# Altium PCB Copy of DAP-PCB.PcbDoc (part 1 of 5)
Units mm, origin at the board's own origin, x right, y up, seen from the top; angles counter-clockwise.
Board outline 63 x 53 mm, 6 copper layers (Top Layer (Sig), L2 (GND), L3 (Sig), L4 (Sig), L5 (GND), Bottom Layer (Sig)), stack 0.87 mm thick; 262 components, 167 nets, 874 pads, 298 vias.
Unrouted connection lines stored in the file: 134.
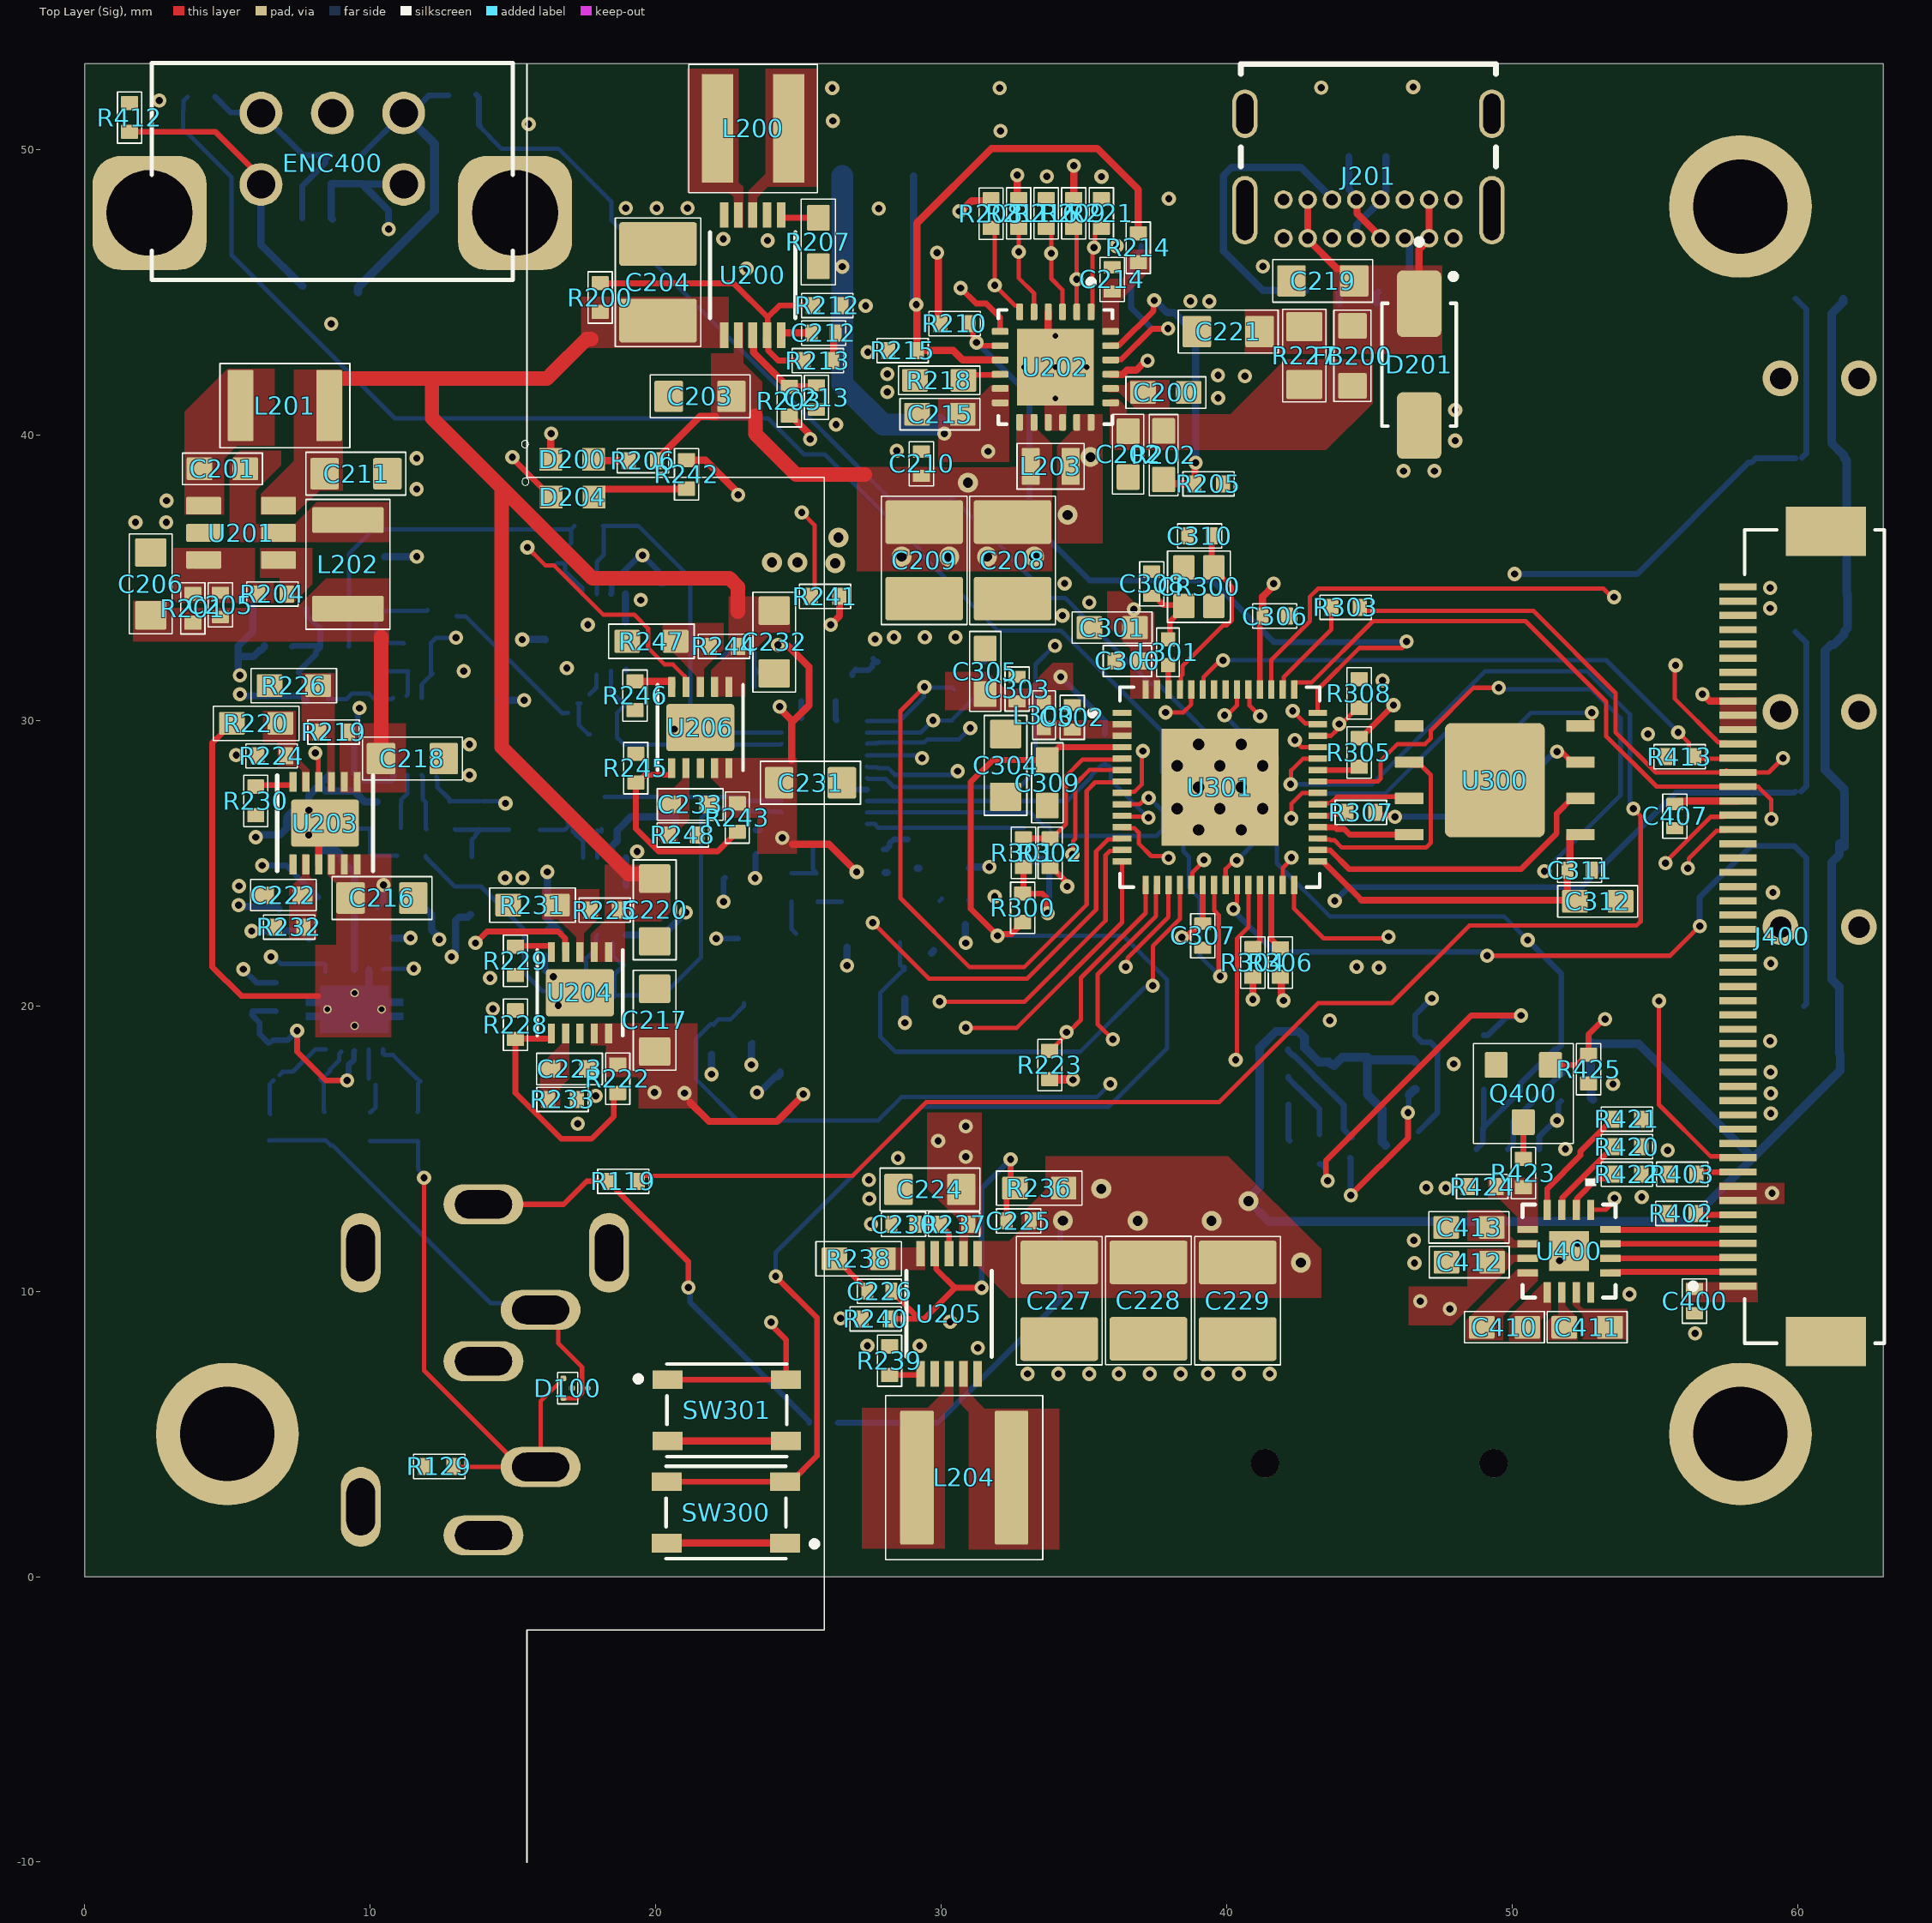
[diagram p0: Top Layer (Sig) view]
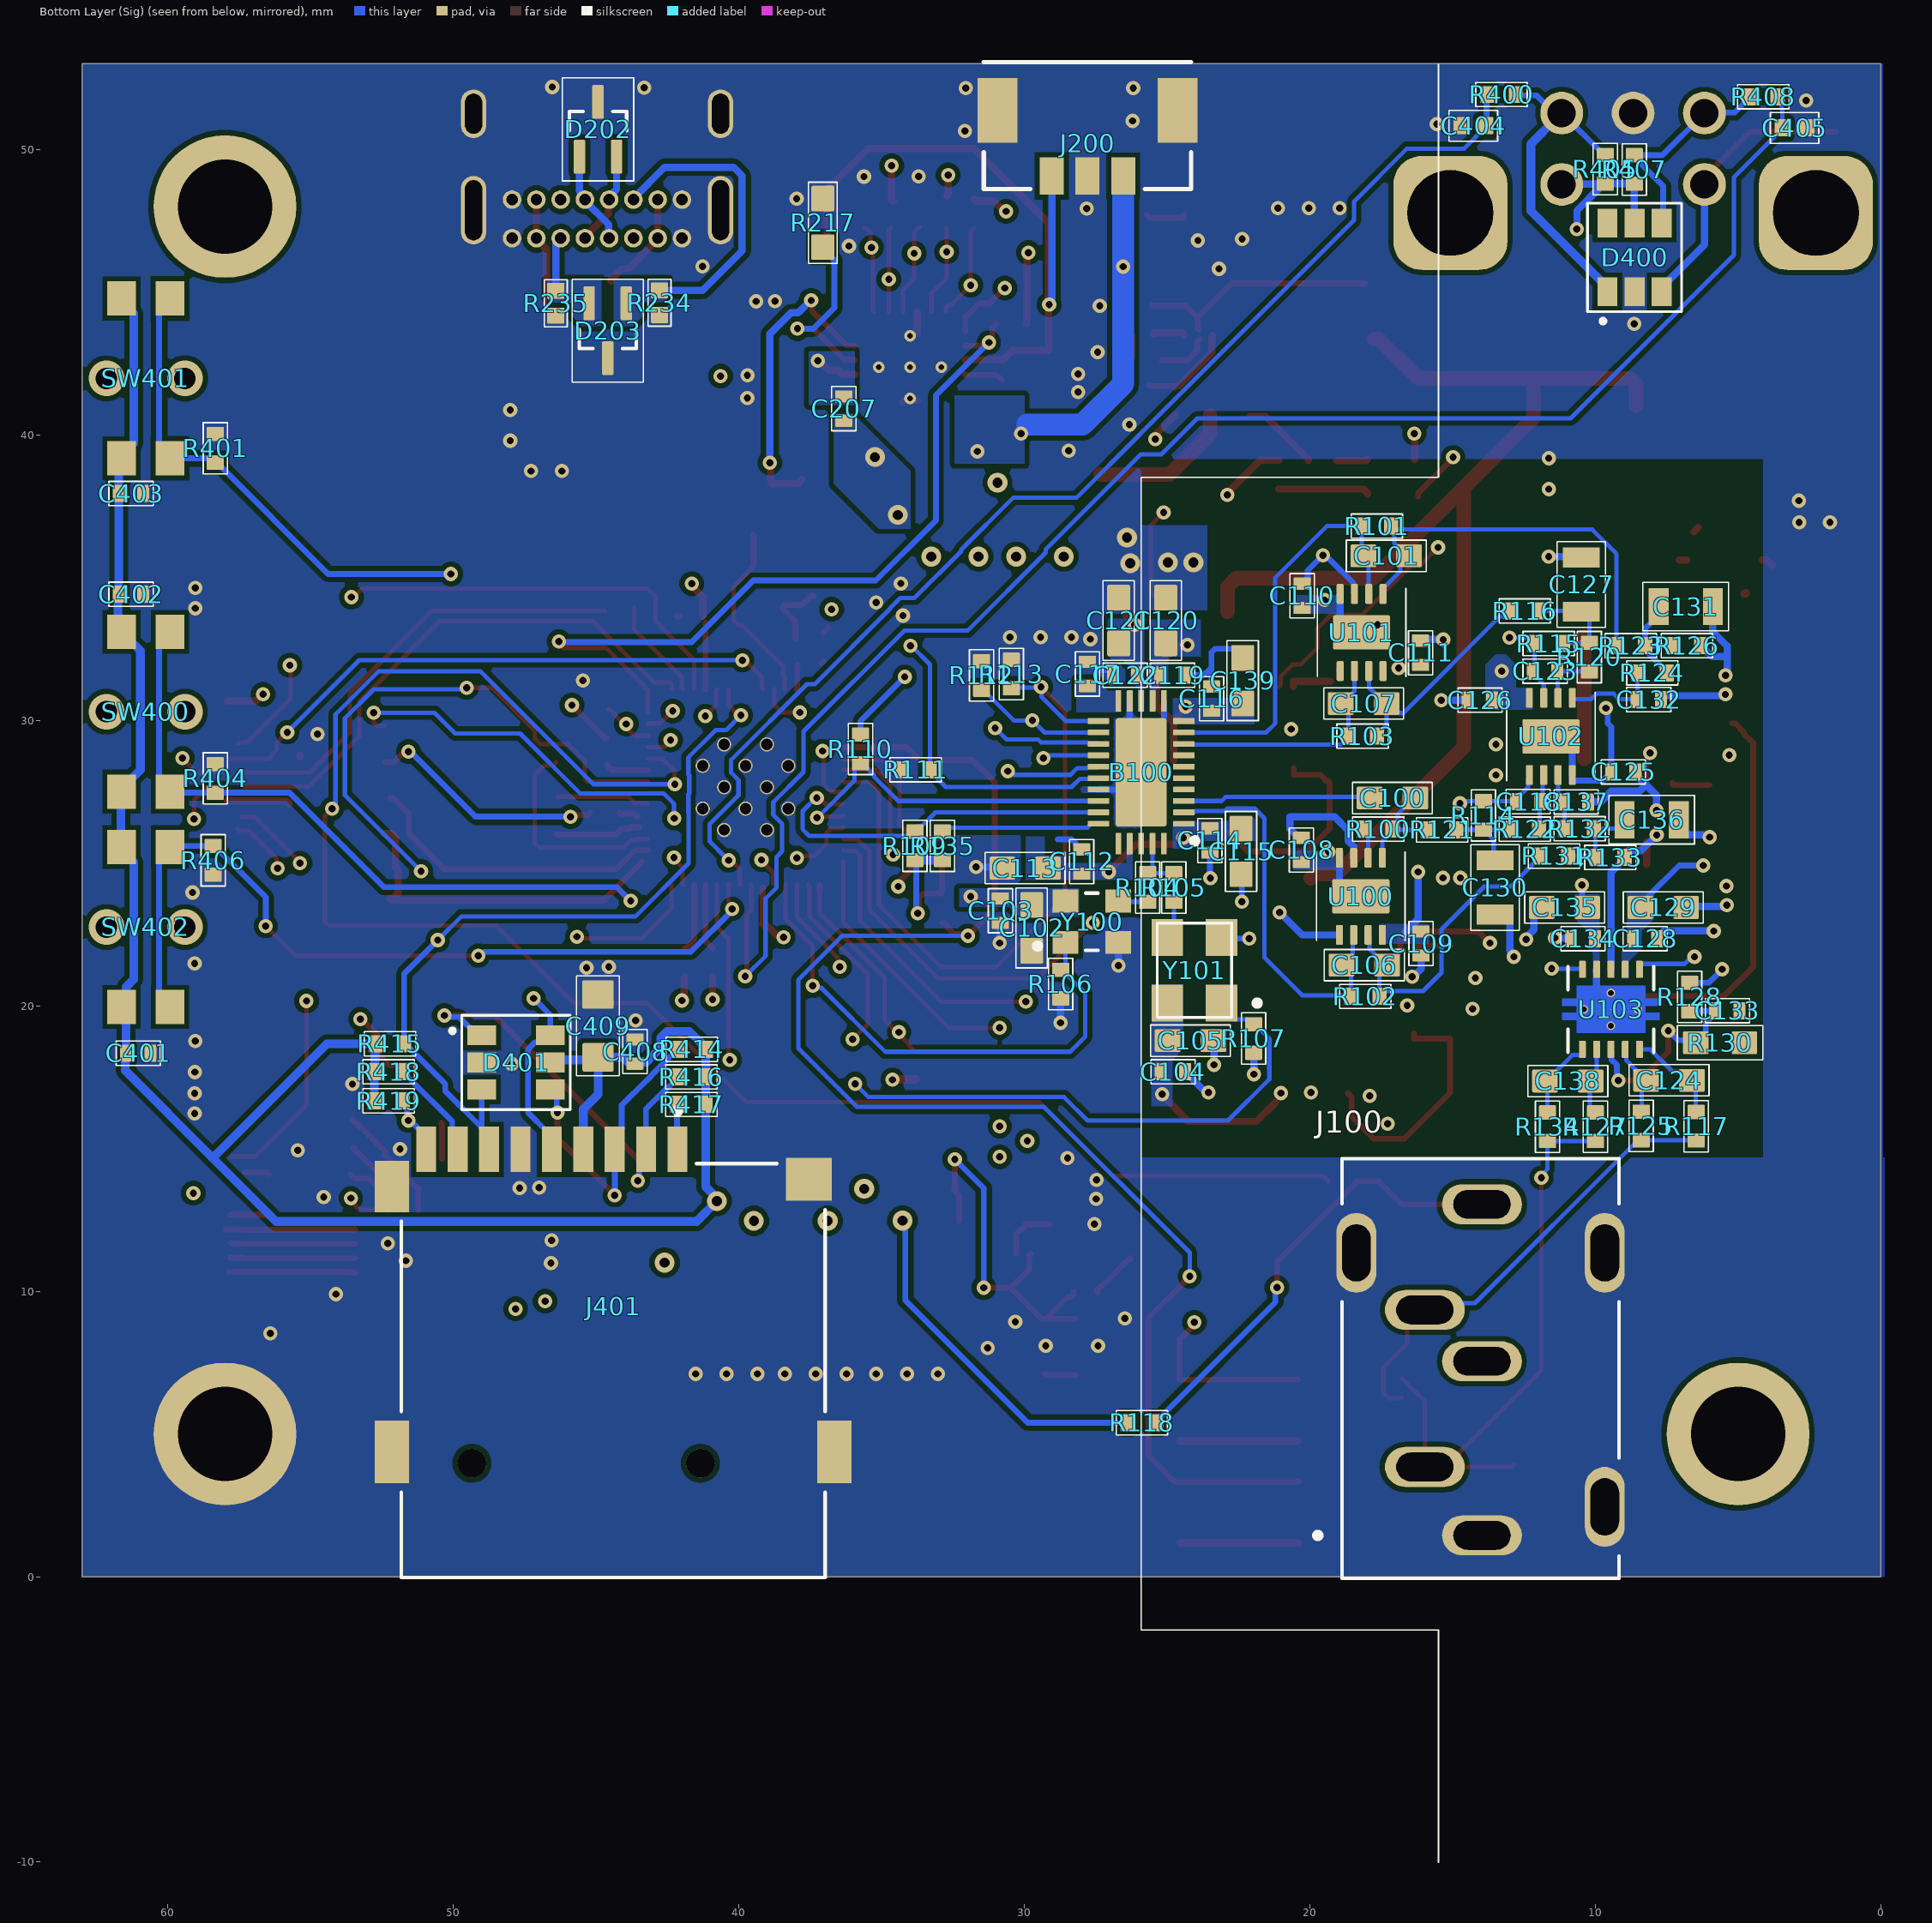
[diagram p1: Bottom Layer (Sig) view, seen from below]
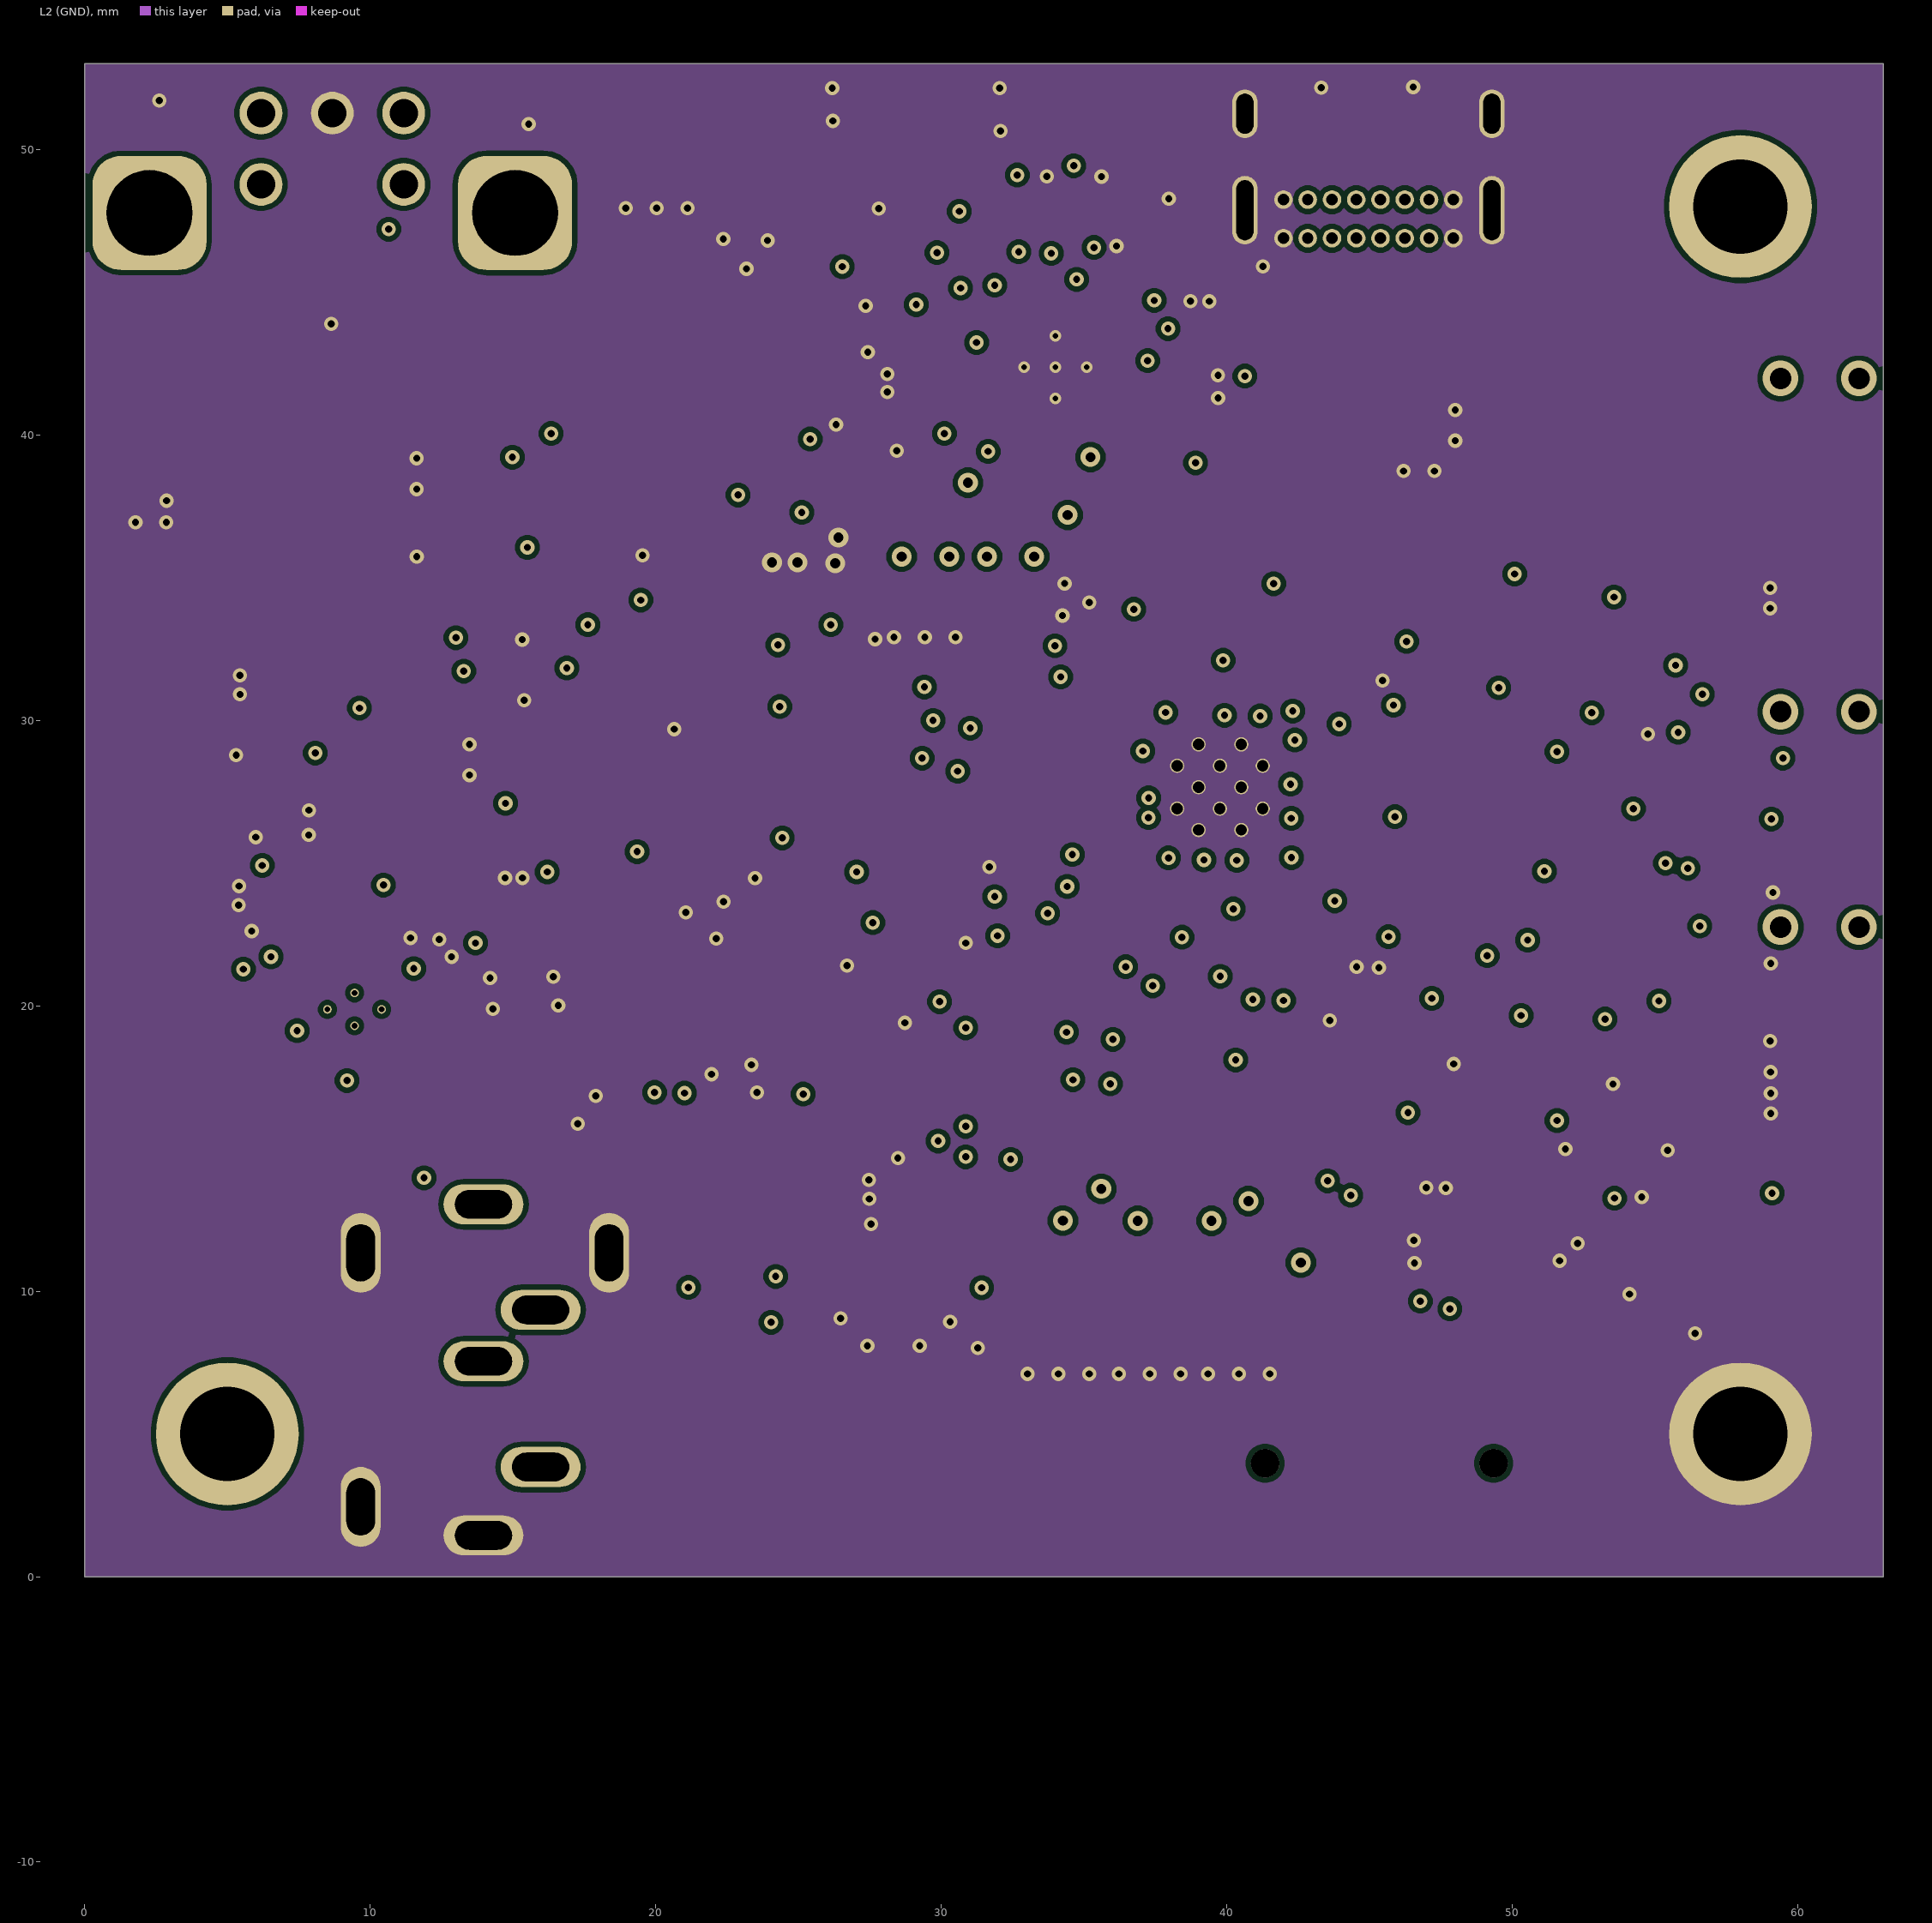
[diagram p2: L2 (GND)]
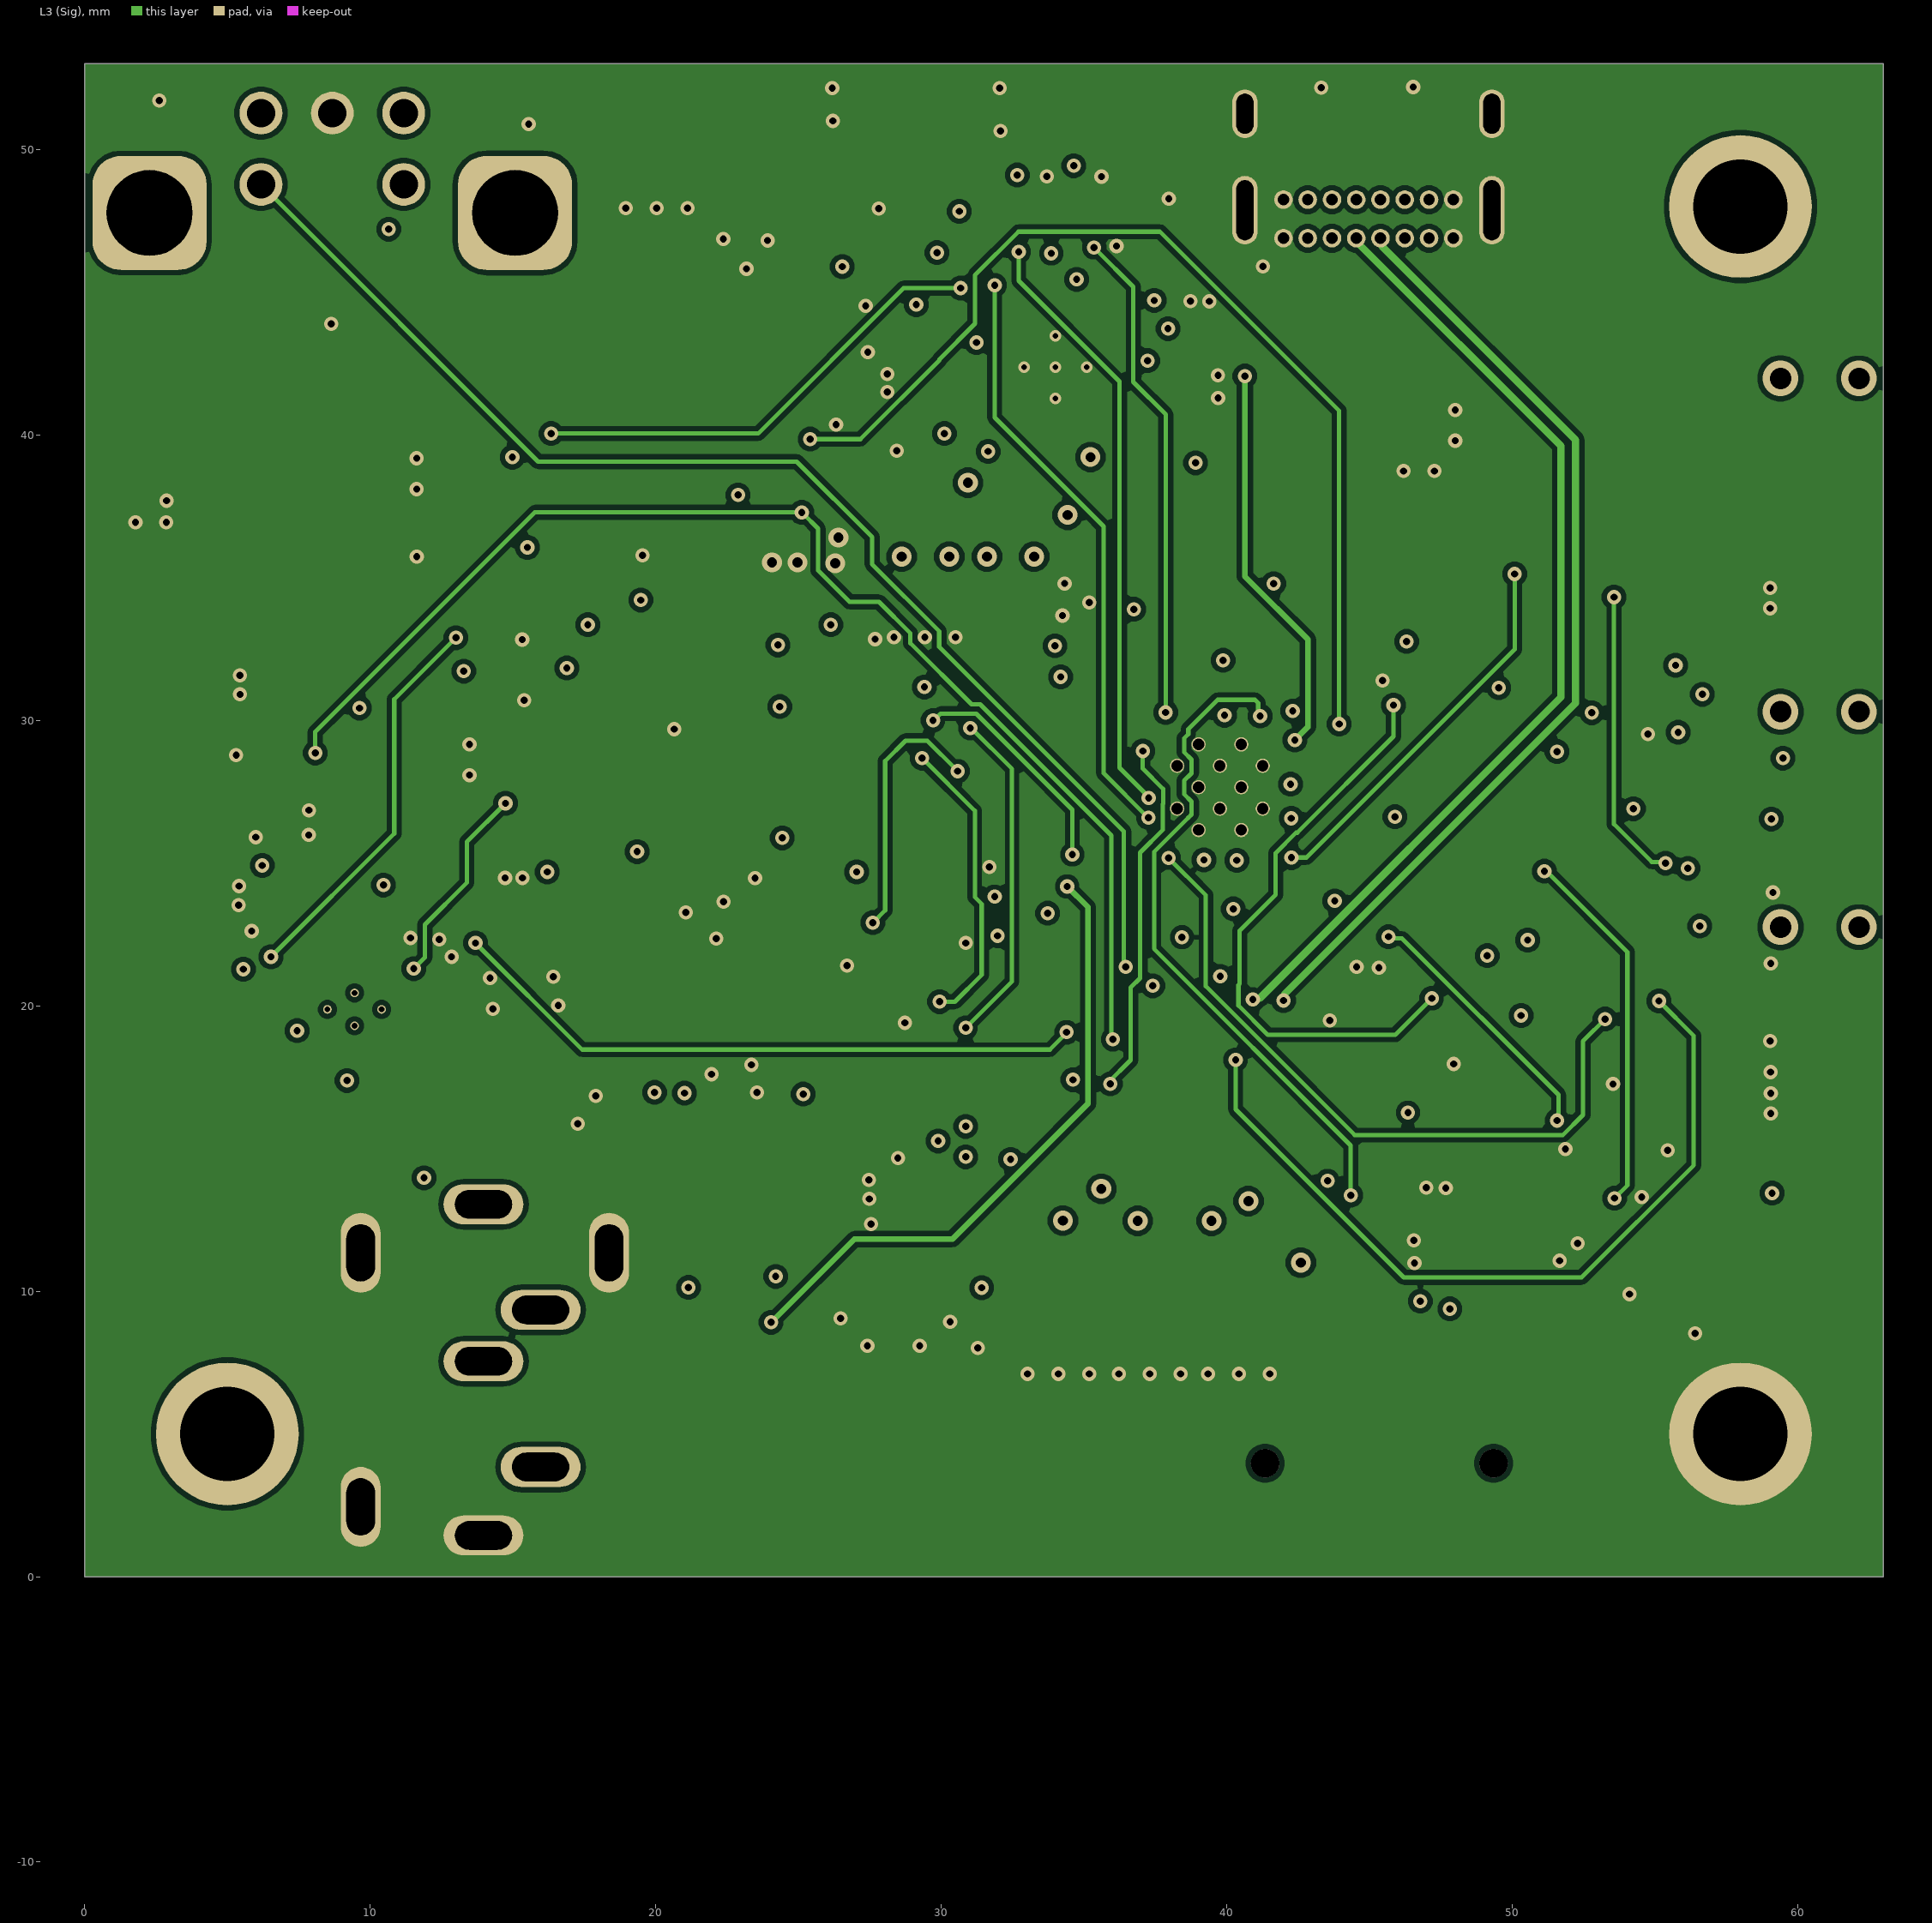
[diagram p3: L3 (Sig)]
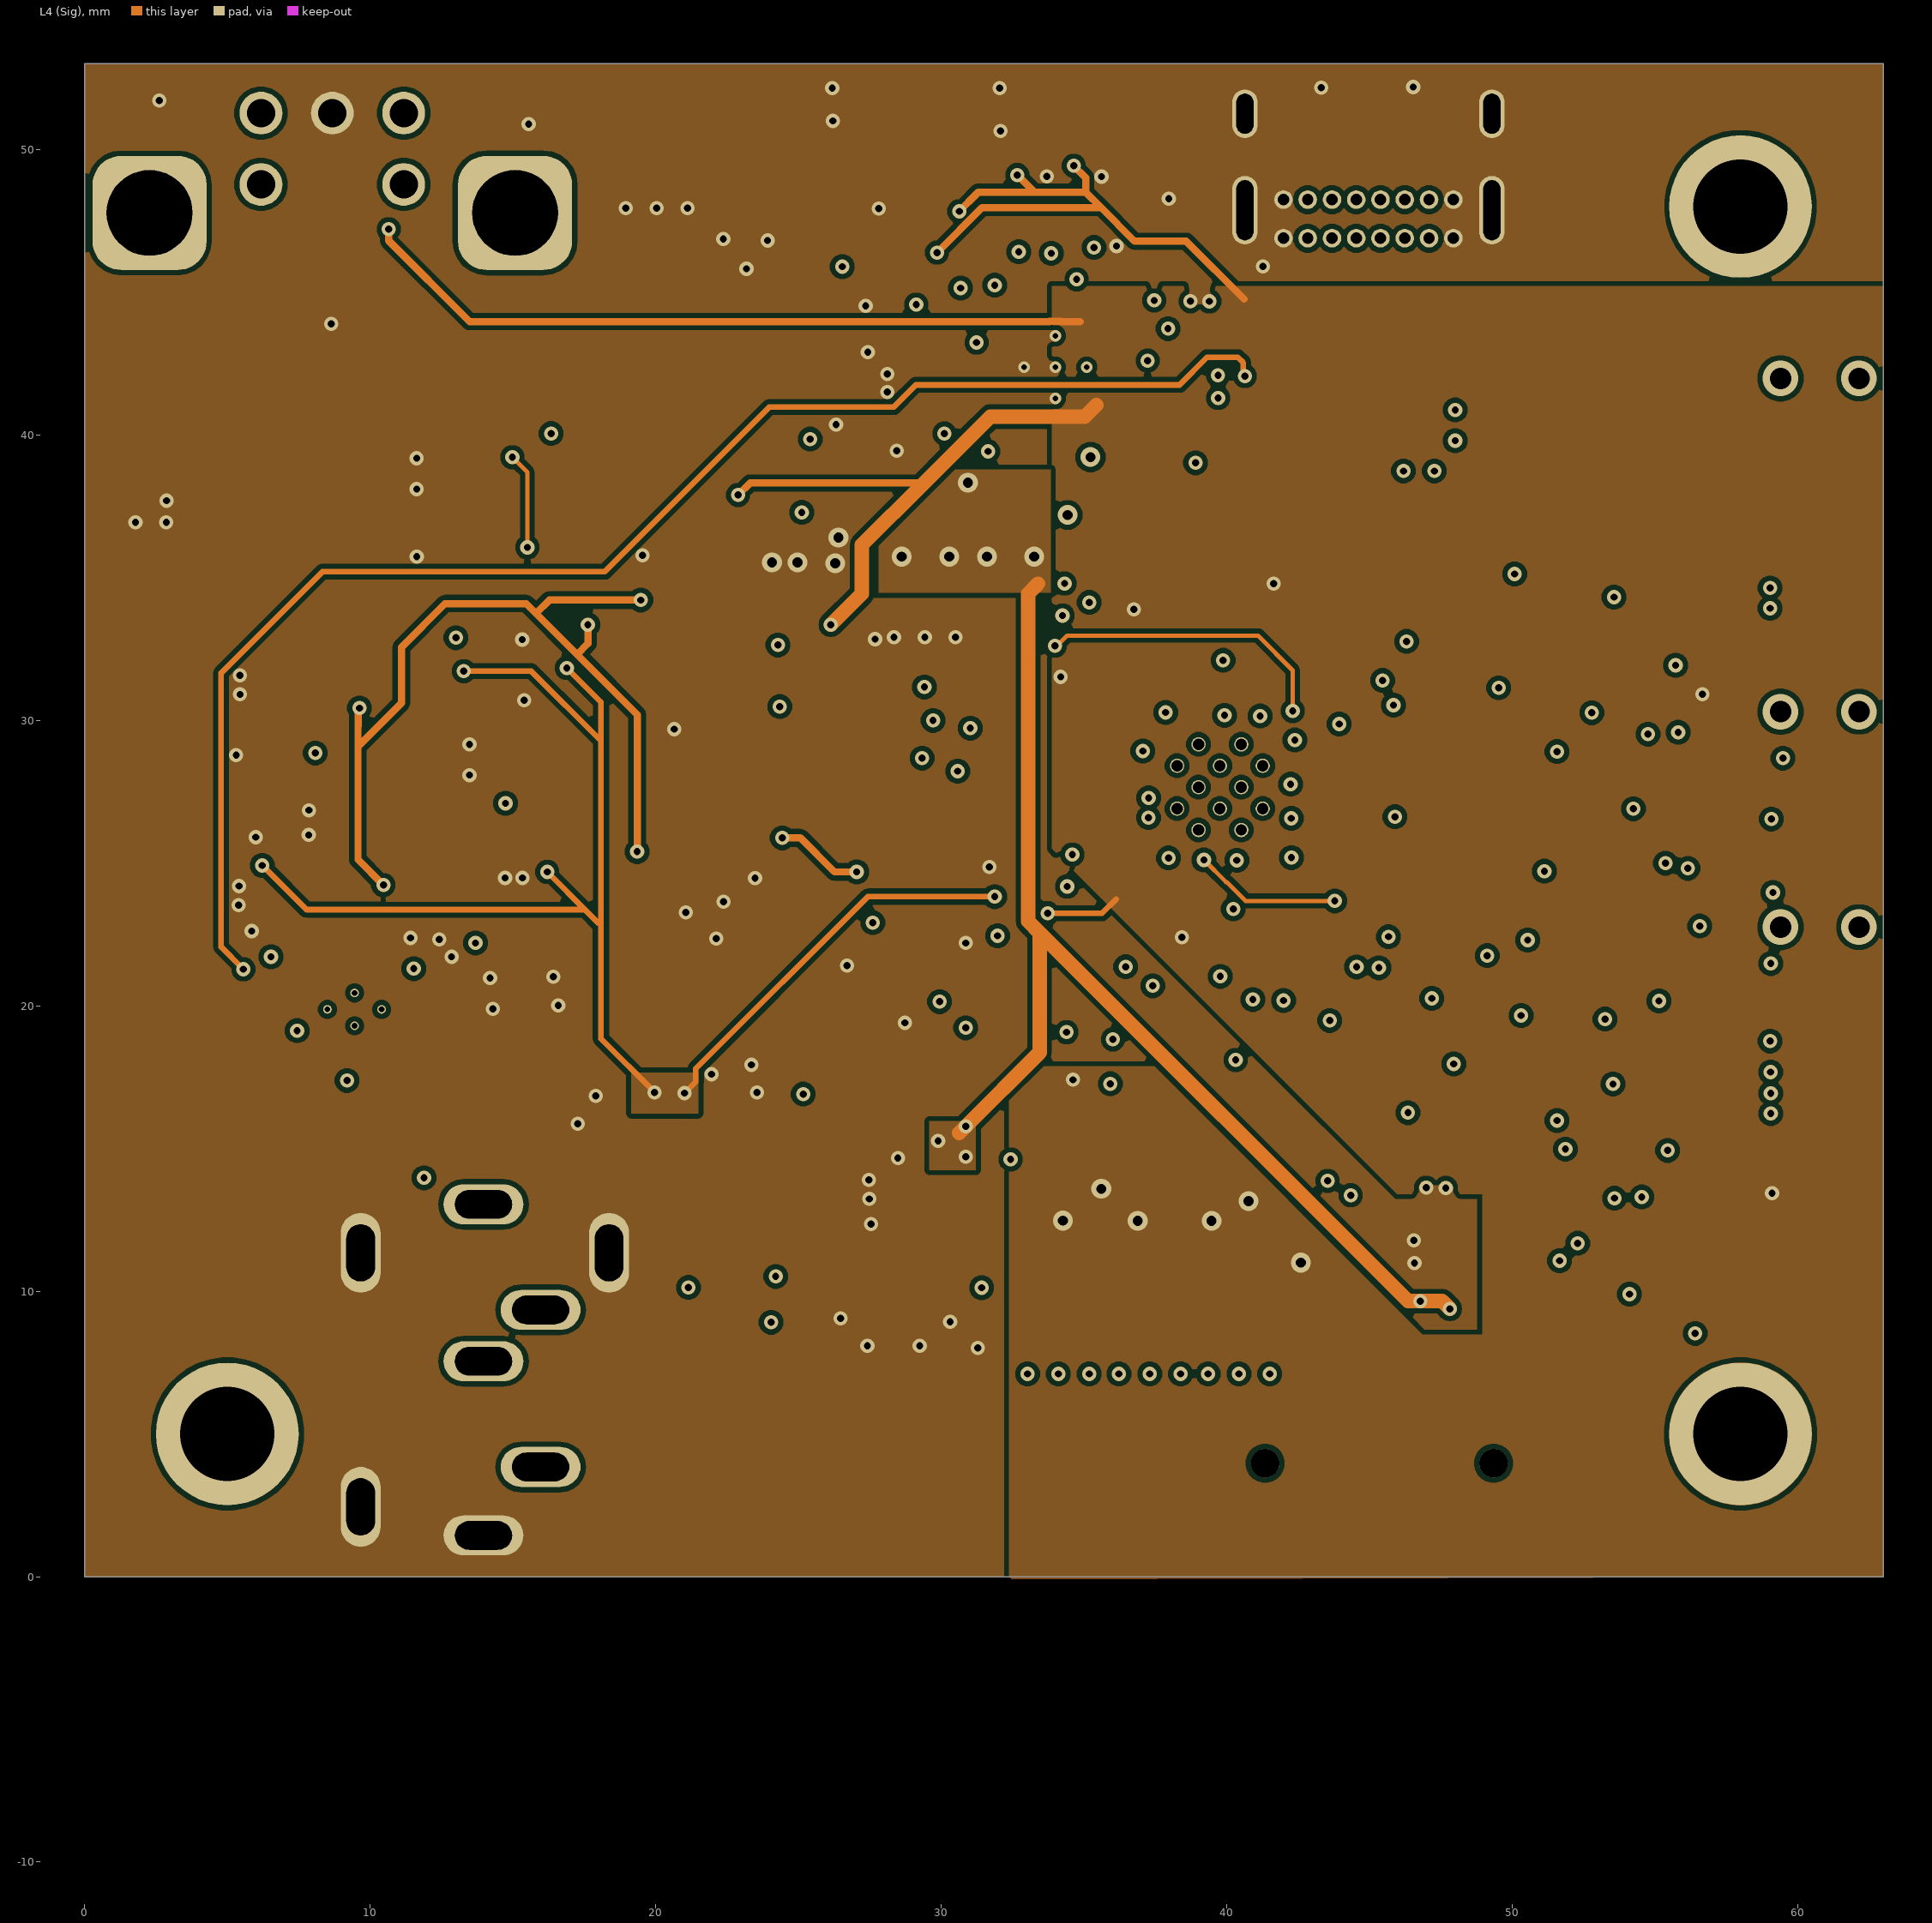
[diagram p4: L4 (Sig)]
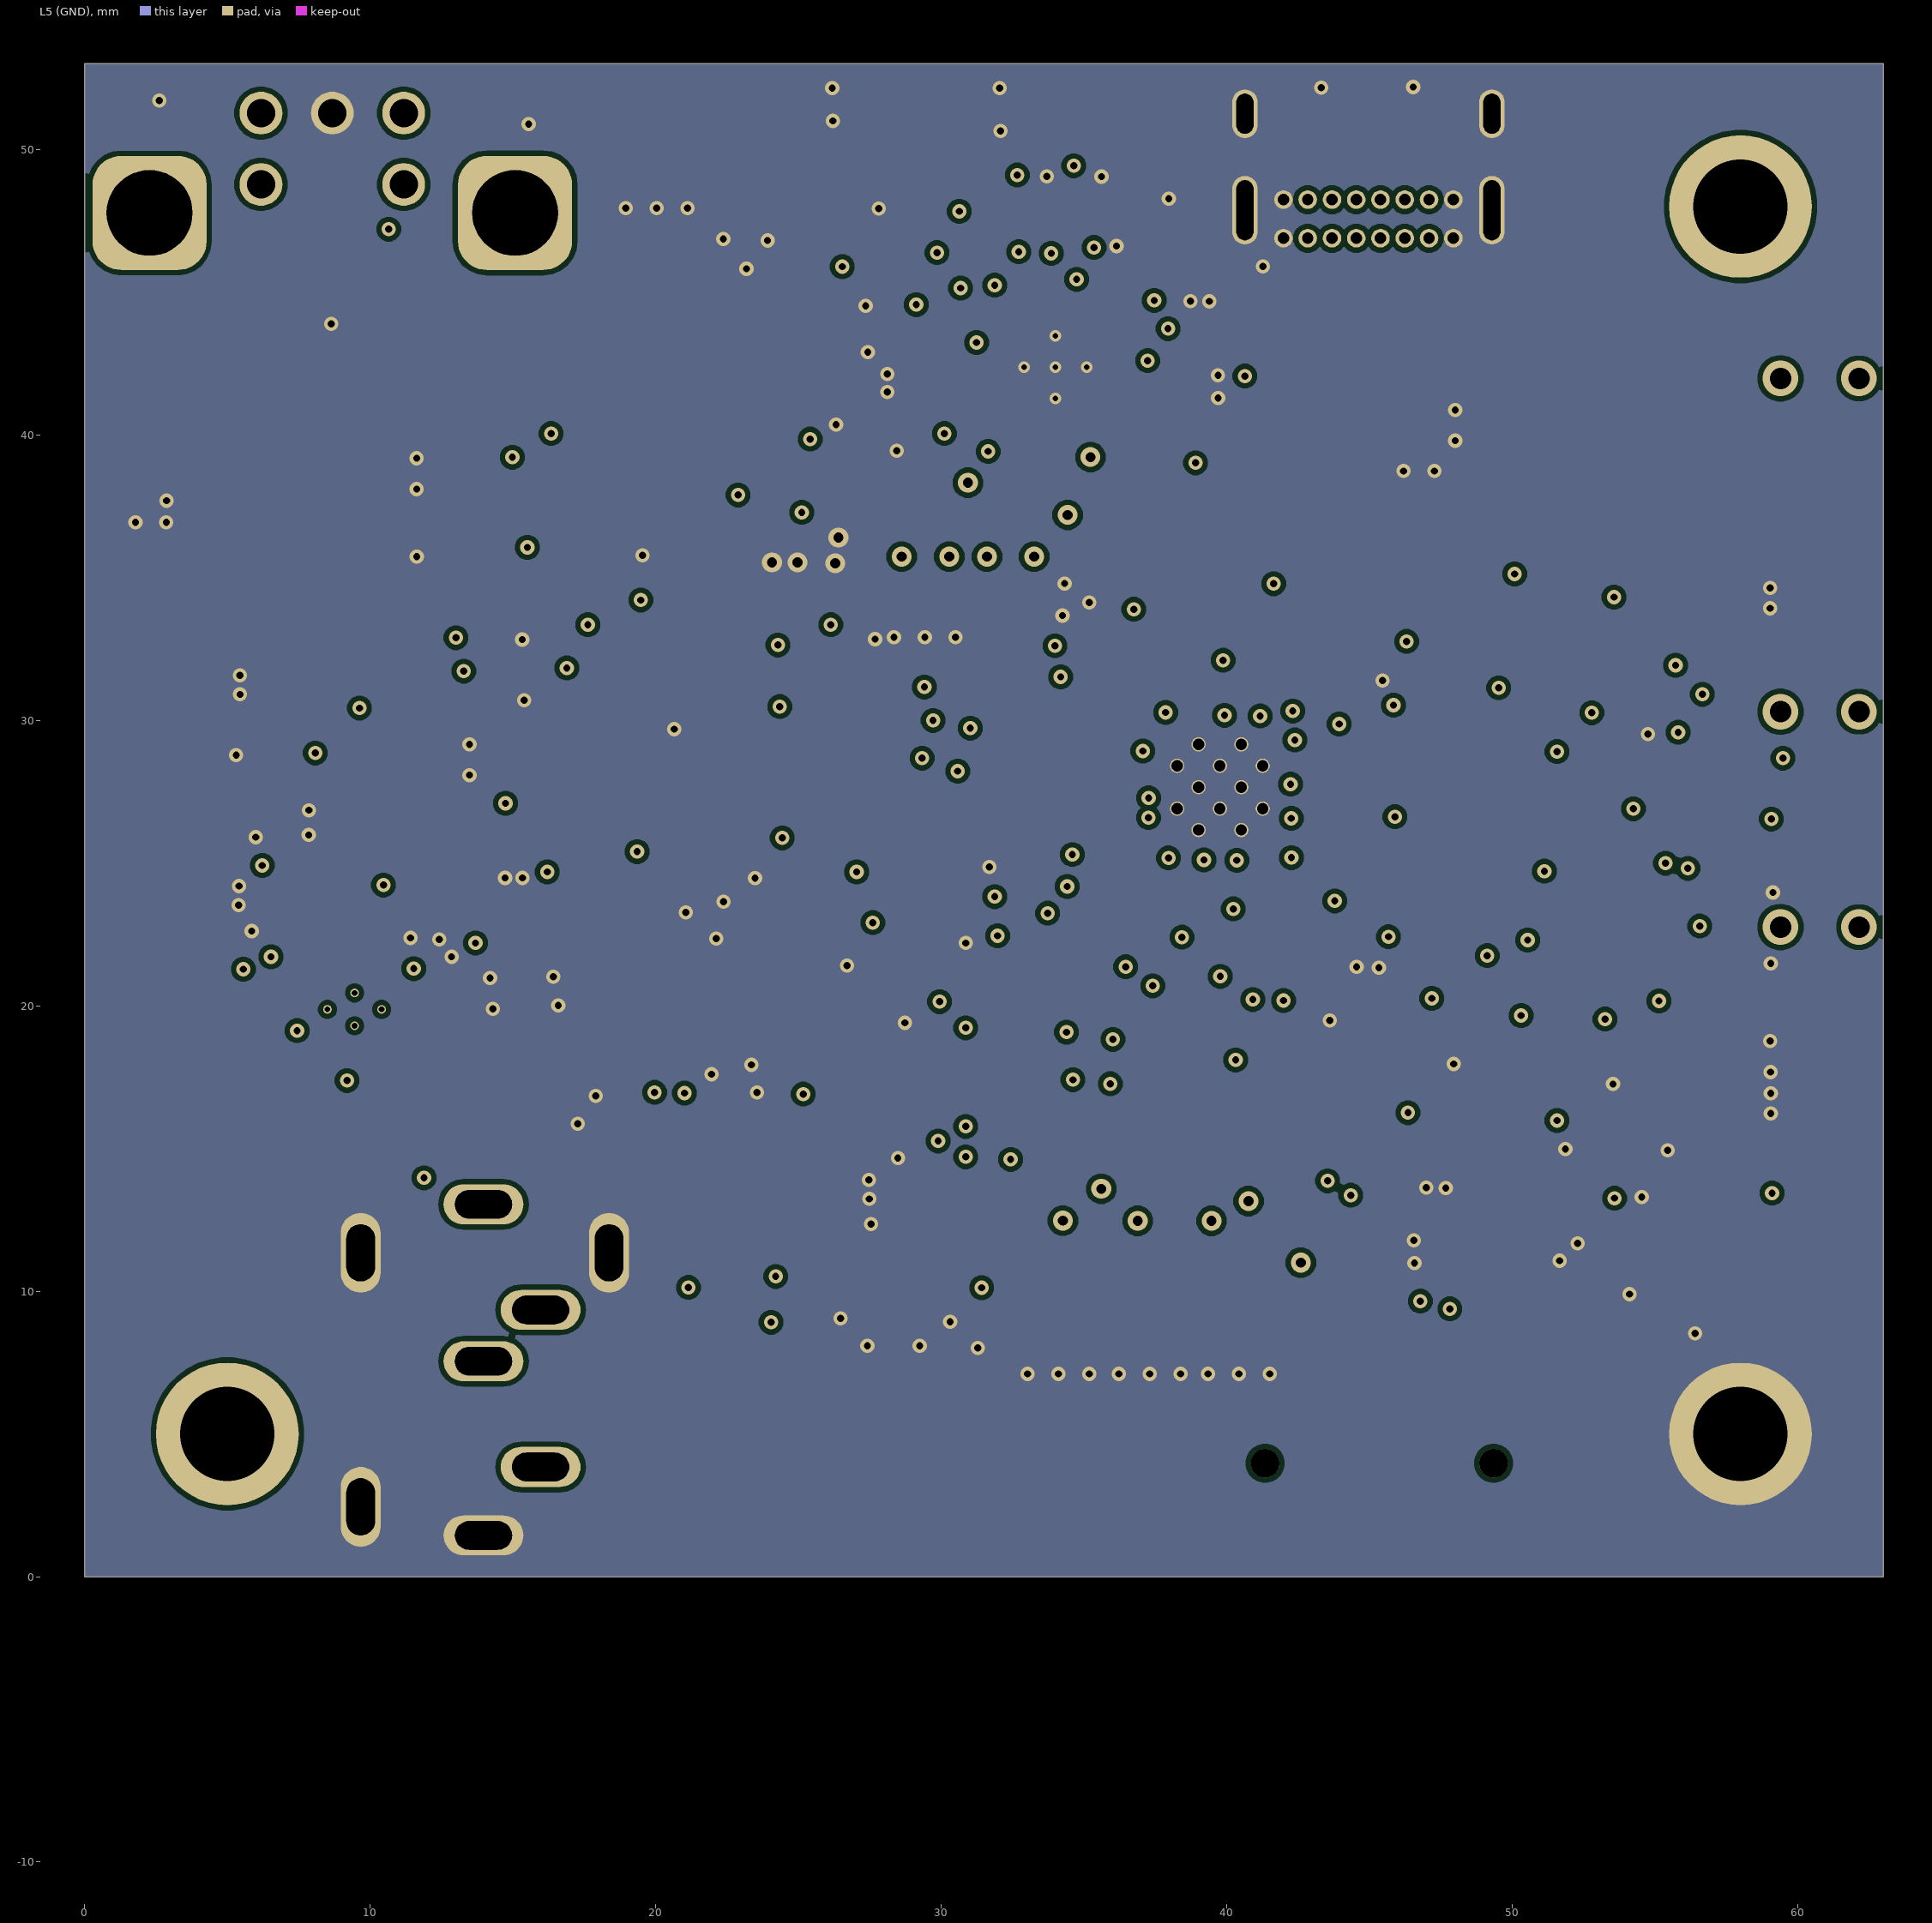
[diagram p5: L5 (GND)]

## Layer stack, top to bottom
Top Solder: solder mask 0.0254, Solder Resist, Dk 4
Top Layer (Sig): signal copper 0.035
Dielectric 2: prepreg 0.11, PP-006, Dk 4.29
L2 (GND): signal copper 0.0175
Dielectric 4: core 0.2, Core-035, Dk 4.6
L3 (Sig): signal copper 0.0175
Dielectric 1: prepreg 0.11, PP-006, Dk 4.29
L4 (Sig): signal copper 0.0175
Dielectric 5: core 0.2, Core-035, Dk 4.6
L5 (GND): signal copper 0.0175
Dielectric 3: prepreg 0.11, PP-006, Dk 4.29
Bottom Layer (Sig): signal copper 0.035
Bottom Solder: solder mask 0.0254, Solder Resist, Dk 4

## Board outline
0,0 0,53 63,53 63,0

## Design rules (kind name [scope] priority, off if disabled: settings)
Clearance [All] p1: gap=0.178 ignorepadtopadclearanceinfootprint=FALSE
DiffPairsRouting [All] p1: maxlimit=0.254 minlimit=0.254 mostfreqgap=0.254 toplayer_minwidth=0.203 toplayer_maxwidth=0.381 toplayer_prefwidth=0.203 midlayer1_minwidth=0.203 midlayer1_maxwidth=0.203 midlayer1_prefwidth=0.203 midlayer2_minwidth=0.203 midlayer2_maxwidth=0.381 midlayer2_prefwidth=0.203 midlayer3_minwidth=0.203 midlayer3_maxwidth=0.381 midlayer3_prefwidth=0.203 midlayer4_minwidth=0.203 midlayer4_maxwidth=0.381 midlayer4_prefwidth=0.203 bottomlayer_minwidth=0.203 bottomlayer_maxwidth=0.381 bottomlayer_prefwidth=0.203 maxuncoupledlength=12.7
PlaneConnect [All] p1: planeconnectstyle=Direct reliefexpansion=0.508 reliefentries=4 reliefconductorwidth=0.254 reliefairgap=0.254
PolygonConnect [All] p1: connectstyle=Direct reliefconductorwidth=0.254 reliefentries=4 polygonreliefangle="90 Angle" airgapwidth=0.254
RoutingVias [All] p1: holewidth=0.711 width=1.27 viastyle="Through Hole" minholewidth=0.711 minwidth=1.27 maxholewidth=0.711 maxwidth=1.27
SolderMaskExpansion [All] p1: expansion=0.102 istentingtop=FALSE
SupplyNets "Schematic Supply Nets_2" [InNet('+3V3_DIG')] p1: voltage=0.000
SupplyNets "Schematic Supply Nets_4" [InNet('-3V3')] p2: voltage=0.000
SupplyNets "Schematic Supply Nets_3" [InNet('+3V3_DAC')] p3: voltage=0.000
SupplyNets "Schematic Supply Nets" [InNet('+3V3_ANALOG')] p4: voltage=0.000
SupplyNets "Schematic Supply Nets_14" [InNet('-3V9')] p5: voltage=0.000
SupplyNets "Schematic Supply Nets_13" [InNet('VUSB')] p6: voltage=0.000
SupplyNets "Schematic Supply Nets_12" [InNet('+3V9')] p7: voltage=0.000
SupplyNets "Schematic Supply Nets_11" [InNet('SYS')] p8: voltage=0.000
SupplyNets "Schematic Supply Nets_10" [InNet('GND')] p9: voltage=0.000
SupplyNets "Schematic Supply Nets_7" [InNet('VDD_SPI')] p10: voltage=0.000
SupplyNets "Schematic Supply Nets_1" [InNet('+LED')] p11: voltage=0.000
Width [All] p1: maxlimit=2.54 minlimit=0.152 preferedwidth=0.203 toplayer_minwidth=0.152 toplayer_prefwidth=0.203 minimp=50.000000 maximp=50.000000 favimp=50.000000
28 further rules are at their usual default settings.

## Classes and differential pairs
component class DAP-Power-2: C200 C201 C202 C203 C204 C205 C206 C207 C208 C209 C210 C211 C212 C213 C214 C215 C216 C217 C218 C219 C220 C221 C222 C223 C224 C225 C226 C227 C228 C229 C230 C231 C232 C233 D200 D201 D202 D203 D204 FB200 J200 J201 L200 L201 L202 L203 L204 R200 R201 R202 R203 R204 R205 R206 R207 R208 R209 R210 R211 R212 R213 R214 R215 R216 R217 R218 R219 R220 R221 R222 R223 R224 R225 R226 R227 R228 R229 R230 R231 R232 R233 R234 R235 R236 R237 R238 R239 R240 R241 R242 R243 R244 R245 R246 R247 R248 U200 U201 U202 U203 U204 U205 U206
component class DAP-Peripherals-4: C400 C401 C402 C403 C404 C405 C407 C408 C409 C410 C411 C412 C413 D400 D401 ENC400 J400 J401 Q400 R400 R401 R402 R403 R404 R405 R406 R407 R408 R412 R413 R414 R415 R416 R417 R418 R419 R420 R421 R422 R423 R424 R425 SW400 SW401 SW402 U400
component class DAP-MCU-3: C300 C301 C302 C303 C304 C305 C306 C307 C308 C309 C310 C311 C312 CR300 L300 L301 R300 R301 R302 R303 R304 R305 R306 R307 R308 SW300 SW301 U300 U301
component class DAP-Audio-1: B100 C100 C101 C102 C103 C104 C105 C106 C107 C108 C109 C110 C111 C112 C113 C114 C115 C116 C117 C118 C119 C120 C121 C122 C123 C124 C125 C126 C127 C128 C129 C130 C131 C132 C133 C134 C135 C136 C137 C138 C139 D100 J100 R100 R101 R102 R103 R104 R105 R106 R107 R109 R110 R111 R112 R113 R114 R115 R116 R117 R118 R119 R120 R121 R122 R123 R124 R125 R126 R127 R128 R129 R130 R131 R132 R133 R134 R135 U100 U101 U102 U103 Y100 Y101
differential pair USB_D: +USB_D_P -USB_D_N

## Components (designator, comment, footprint, x,y, rotation, side; value= is the part's Value field where it differs from the comment)
B100 "DAC Audiophile" QFN40P300X500X80-31N-D 25.908,28.176 r0 bottom
C100 "CAP CER 1500PF 50V C0G/NP0 0603" CAPC1608X100N 17.107,27.28 r180 bottom
C101 "CAP CER 1500PF 50V C0G/NP0 0603" CAPC1608X100N 17.323,35.763 r180 bottom
C102 "CAP CER 1UF 25V X7R 0603" CAPC1608X100N 29.743,22.728 r270 bottom
C103 "CAP CER 0.1UF 50V X7R 0402" CAPC1005X60N 30.836,23.332 r90 bottom
C104 "CAP CER 0.1UF 50V X7R 0402" CAPC1005X60N 24.79,17.686 r0 bottom
C105 "CAP CER 1UF 25V X7R 0603" CAPC1608X100N 24.181,18.778 r180 bottom
C106 "CAP CER 1500PF 50V C0G/NP0 0603" CAPC1608X100N 18.092,21.424 r180 bottom
C107 "CAP CER 1500PF 50V C0G/NP0 0603" CAPC1608X100N 18.114,30.589 r180 bottom
C108 "CAP CER 0.1UF 50V X7R 0402" CAPC1005X60N 20.295,25.458 r270 bottom
C109 "CAP CER 0.1UF 50V X7R 0402" CAPC1005X60N 16.104,22.182 r90 bottom
C110 "CAP CER 0.1UF 50V X7R 0402" CAPC1005X60N 20.269,34.366 r270 bottom
C111 "CAP CER 0.1UF 50V X7R 0402" CAPC1005X60N 16.12,32.367 r270 bottom
C112 "CAP CER 0.1UF 50V X7R 0402" CAPC1005X60N 27.991,25.052 r270 bottom
C113 "CAP CER 1UF 25V X7R 0603" CAPC1608X100N 29.972,24.823 r0 bottom
C114 "CAP CER 0.1UF 50V X7R 0402" CAPC1005X60N 23.501,25.789 r90 bottom
C115 "CAP CER 1UF 25V X7R 0603" CAPC1608X100N 22.409,25.408 r270 bottom
C116 "CAP CER 0.1UF 50V X7R 0402" CAPC1005X60N 23.444,30.76 r270 bottom
C117 "CAP CER 4.7UF 6.3V X5R 0402" CAPC1005X60N 27.788,31.624 r270 bottom
C118 "CAP CER 2700PF 50V C0G/NP0 0402" CAPC1005X60N 12.351,27.152 r180 bottom
C119 "CAP CER 0.1UF 50V X7R 0402" CAPC1005X60N 24.809,31.58 r0 bottom
C120 "CAP CER 1UF 25V X7R 0603" CAPC1608X100N 25.044,33.497 r90 bottom
C121 "CAP CER 1UF 25V X7R 0603" CAPC1608X100N 26.695,33.497 r90 bottom
C122 "CAP CER 0.1UF 50V X7R 0402" CAPC1005X60N 26.467,31.58 r180 bottom
C123 "CAP CER 2700PF 50V C0G/NP0 0402" CAPC1005X60N 11.76,31.724 r180 bottom
C124 "CAP CER 1500PF 50V C0G/NP0 0603" CAPC1608X100N 7.418,17.388 r0 bottom
C125 "CAP CER 0.1UF 50V X7R 0402" CAPC1005X60N 9.017,28.194 r0 bottom
C126 "CAP CER 0.1UF 50V X7R 0402" CAPC1005X60N 14.039,30.708 r180 bottom
C127 "CAP CER 0.013UF 50V C0G/NP0 0805" CAP_MUR_0805 10.49,34.757 r90 bottom
C128 "CAP CER 0.1UF 50V X7R 0402" CAPC1005X60N 8.255,22.352 r0 bottom
C129 "CAP CER 1UF 25V X7R 0603" CAPC1608X100N 7.62,23.444 r180 bottom
C130 "CAP CER 0.013UF 50V C0G/NP0 0805" CAP_MUR_0805 13.513,24.145 r270 bottom
C131 "CAP CER 0.013UF 50V C0G/NP0 0805" CAP_MUR_0805 6.833,33.985 r180 bottom
C132 "CAP CER 2700PF 50V C0G/NP0 0402" CAPC1005X60N 8.128,30.725 r180 bottom
C133 "CAP CER 0.1UF 50V X7R 0402" CAPC1005X60N 5.374,19.827 r0 bottom
C134 "CAP CER 0.1UF 50V X7R 0402" CAPC1005X60N 10.433,22.352 r180 bottom
C135 "CAP CER 1UF 25V X7R 0603" CAPC1608X100N 11.074,23.444 r0 bottom
C136 "CAP CER 0.013UF 50V C0G/NP0 0805" CAP_MUR_0805 8.026,26.518 r180 bottom
C137 "CAP CER 2700PF 50V C0G/NP0 0402" CAPC1005X60N 10.675,27.144 r180 bottom
C138 "CAP CER 1500PF 50V C0G/NP0 0603" CAPC1608X100N 10.962,17.363 r180 bottom
C139 "CAP CER 1UF 25V X7R 0603" CAPC1608X100N 22.352,31.389 r90 bottom
C200 "CAP CER 1UF 25V X7R 0603" CAPC1608X100N 37.871,41.486 r0 top
C201 "CAP CER 2.2UF 25V X7R 0603" CAPC1608X100N 4.826,38.811 r0 top
C202 "CAP CER 2.2UF 25V X7R 0603" CAPC1608X100N 36.551,39.327 r270 top
C203 "CAP CER 10UF 10V X7R 0805" CAPC2012X140N 21.557,41.351 r0 top
C204 "CAP CER 22UF 25V X7S 1210" CAPC3225X270N 20.087,45.347 r270 top
C205 "CAP CER 22PF 50V C0G/NP0 0402" CAPC1005X60N 4.754,34.044 r270 top
C206 "CAP CER 10UF 10V X7R 0805" CAPC2012X140N 2.316,34.78 r270 top
C207 "CAP CER 0.033UF 16V X7R 0402" CAPC1005X60N 36.322,40.92 r90 bottom
C208 "CAP CER 22UF 25V X7S 1210" CAPC3225X270N 32.504,35.606 r90 top
C209 "CAP CER 22UF 25V X7S 1210" CAPC3225X270N 29.405,35.606 r90 top
C210 "CAP CER 0.1UF 50V X7R 0402" CAPC1005X60N 29.312,38.989 r270 top
C211 "CAP CER 10UF 10V X7R 0805" CAPC2012X140N 9.504,38.641 r180 top
C212 "CAP CER 1500PF 50V C0G/NP0 0402" CAPC1005X60N 25.883,43.569 r180 top
C213 "CAP CER 0.1UF 50V X7R 0402" CAPC1005X60N 25.633,41.314 r90 top
C214 "CAP CER 1UF 35V X5R 0402" CAPC1005X60N 35.992,45.448 r270 top
C215 "CAP CER 1UF 25V X7R 0603" CAPC1608X100N 29.959,40.724 r180 top
C216 "CAP CER 10UF 10V X7R 0805" CAPC2012X140N 10.414,23.774 r180 top
C217 "CAP CER 10UF 10V X7R 0805" CAPC2012X140N 19.967,19.498 r270 top
C218 "CAP CER 10UF 10V X7R 0805" CAPC2012X140N 11.481,28.659 r180 top
C219 "CAP CER 4.7UF 16V X7R 0805" CAPC2012X140N 43.371,45.398 r0 top
C220 "CAP CER 10UF 10V X7R 0805" CAPC2012X140N 19.969,23.359 r90 top
C221 "CAP CER 4.7UF 16V X7R 0805" CAPC2012X140N 40.056,43.619 r0 top
C222 "CAP TANT 2.2UF 20% 16V 0603" CAP_298D225X0016M2T 6.96,23.876 r0 top
C223 "CAP TANT 2.2UF 20% 16V 0603" CAP_298D225X0016M2T 16.985,17.788 r0 top
C224 "CAP CER 10UF 10V X7R 0805" CAPC2012X140N 29.609,13.564 r0 top
C225 "CAP CER 100PF 50V C0G/NP0 0402" CAPC1005X60N 32.715,12.461 r0 top
C226 "CAP CER 1500PF 50V C0G/NP0 0402" CAPC1005X60N 27.838,9.997 r180 top
C227 "CAP CER 22UF 25V X7S 1210" CAPC3225X270N 34.138,9.667 r90 top
C228 "CAP CER 22UF 25V X7S 1210" CAPC3225X270N 37.262,9.672 r90 top
C229 "CAP CER 22UF 25V X7S 1210" CAPC3225X270N 40.386,9.667 r90 top
C230 "CAP CER 0.1UF 50V X7R 0402" CAPC1005X60N 28.683,12.344 r0 top
C231 "CAP CER 10UF 10V X7R 0805" CAPC2012X140N 25.425,27.813 r180 top
C232 "CAP CER 10UF 10V X7R 0805" CAPC2012X140N 24.155,32.744 r90 top
C233 "CAP TANT 2.2UF 20% 16V 0603" CAP_298D225X0016M2T 21.209,27.054 r0 top
C300 "CAP CER 10000PF 16V X7R 0402" CAPC1005X55N 36.525,32.08 r0 top
C301 "CAP CER 1UF 25V X7R 0603" CAPC1608X100N 35.992,33.249 r180 top
C302 "CAP CER 0.1UF 50V X7R 0402" CAPC1005X60N 34.593,30.104 r270 top
C303 "CAP CER 0.1UF 50V X7R 0402" CAPC1005X60N 32.663,31.095 r270 top
C304 "CAP CER 10UF 10V X7R 0805" CAPC2012X140N 32.257,28.42 r90 top
C305 "CAP CER 1UF 25V X7R 0603" CAPC1608X100N 31.545,31.717 r90 top
C306 "CAP CER 0.1UF 50V X7R 0402" CAPC1005X60N 41.688,33.655 r180 top
C307 "CAP CER 0.1UF 50V X7R 0402" CAPC1005X60N 39.167,22.454 r90 top
C308 "CAP CER 12PF 50V C0G/NP0 0402" CAPC1005X60N 37.378,34.785 r90 top
C309 "CAP CER 1UF 25V X7R 0603" CAPC1608X100N 33.721,27.812 r270 top
C310 "CAP CER 12PF 50V C0G/NP0 0402" CAPC1005X60N 39.055,36.461 r180 top
C311 "CAP CER 0.1UF 50V X7R 0402" CAPC1005X60N 52.364,24.745 r180 top
C312 "CAP CER 1UF 25V X7R 0603" CAPC1608X100N 52.999,23.659 r0 top
C400 "CAP CER 0.1UF 50V X7R 0402" CAPC1005X60N 56.388,9.652 r90 top
C401 "CAP CER 0.1UF 50V X7R 0402" CAPC1005X60N 61.036,18.339 r0 bottom
C402 "CAP CER 0.1UF 50V X7R 0402" CAPC1005X60N 61.29,34.417 r0 bottom
C403 "CAP CER 0.1UF 50V X7R 0402" CAPC1005X60N 61.29,37.948 r0 bottom
C404 "CAP CER 10000PF 16V X7R 0402" CAPC1005X55N 14.273,50.833 r180 bottom
C405 "CAP CER 10000PF 16V X7R 0402" CAPC1005X55N 3.021,50.757 r0 bottom
C407 "CAP CER 0.1UF 50V X7R 0402" CAPC1005X60N 55.702,26.645 r90 top
C408 "CAP CER 0.1UF 50V X7R 0402" CAPC1005X60N 43.637,18.396 r270 bottom
C409 "CAP CER 10UF 10V X7R 0805" CAPC2012X140N 44.933,19.294 r270 bottom
C410 "CAP CER 1UF 25V X7R 0603" CAPC1608X100N 49.733,8.738 r180 top
C411 "CAP CER 1UF 25V X7R 0603" CAPC1608X100N 52.629,8.738 r0 top
C412 "CAP CER 1UF 25V X7R 0603" CAPC1608X100N 48.501,11.017 r180 top
C413 "CAP CER 1UF 25V X7R 0603" CAPC1608X100N 48.489,12.236 r180 top
CR300 "CRYSTAL 40.0000MHZ 10PF SMD" CRYST_ECS-400 39.029,34.683 r90 top
D100 "TVS DIODE 3.6VWM 8.4VC 3X2SON" IC_ESD122DMXR 16.919,6.604 r180 top
D200 "LED GREEN CLEAR CHIP SMD" LEDM1608X80 17.077,39.142 r0 top
D201 "TVS DIODE 7VWM 12VC SMA" DIOM5226X230N 46.745,42.462 r270 top
D202 "TVS DIODE 5.5VWM 12.4VC SC703" SOT65P210X110-3N 44.933,50.706 r90 bottom
D203 "TVS DIODE 5.5VWM 12.4VC SC703" SOT65P210X110-3N 44.592,43.65 r270 bottom
D204 "LED GREEN CLEAR CHIP SMD" LEDM1608X80 17.091,37.828 r0 top
D400 "TVS, ESD, ARRAY, UNI-DIR, 5.0V," TVS_ARR_4UNI_FP 8.626,46.216 r90 bottom
D401 "TVS, ESD, ARRAY, UNI-DIR, 5.0V," TVS_ARR_4UNI_FP 47.803,18.016 r180 bottom
ENC400 "ENCODER MECH QUAD RGH ANG PC PIN" EN12-VS_TTE 6.176,42.538 r180 top locked
FB200 "FERRITE BEAD 120 OHM 0805 1LN" WE-CBF_0805_W4.0 44.408,42.77 r270 top
J100 "CONN JACK STEREO 3.5MM R/A" CUI_SJ1-3535NS 9.906,10.588 r90 bottom
J200 "CONN HEADER SMD R/A 3POS 1.25MM" CONN_505567_03_MOL 27.788,50.825 r180 bottom
J201 "CONN RCPT USB2.0 TYPE C 16+8POS" GCT_USB4085-GF-A_REVA4 44.967,51.252 r180 top
J400 "CONN FFC BOTTOM 50POS 0.5MM R/A" AMPHENOL_F32D-1A7Y1-21050 60.992,22.427 r90 top
J401 "CONN MICROSD CARD R/A SMD" CUI_MSD-1-A 44.399,7.221 r180 bottom
L200 "FIXED IND 6.8UH 4A 74.1 MOHM SMD" IND_SRP4030FA 23.415,50.733 r90 top
L201 "FIXED IND 22UH 300MA 810 MOHM" IND_LQW32FT220M2HL 7.015,41.029 r180 top
L202 "FIXED IND 22UH 300MA 810 MOHM" IND_LQW32FT220M2HL 9.224,35.465 r270 top
L203 "FIXED IND 1UH 2A 96 MOHM SMD" IND_TFM141206BLE 33.835,38.899 r180 top
L204 "FIXED IND 18UH 4.5A 62.5 MOHM" IND_XGL5050 30.81,3.469 r0 top
L300 "FIXED IND 2NH 1A 50 MOHM SMD" IND_MHQ100507 33.603,30.18 r90 top
L301 "FIXED IND 24NH 250MA 700 MOHM" IND_MHQ100507 37.948,32.385 r270 top
Q400 "MOSFET N-CH 60V 115MA SOT23" SOT-23_MCC 50.394,16.926 r180 top
R100 "RES SMD 499 OHM 0.1% 1/16W 0402" RESC1005X40N 17.602,26.187 r180 bottom
R101 "RES SMD 499 OHM 0.1% 1/16W 0402" RESC1005X40N 17.653,36.805 r180 bottom
R102 "RES SMD 499 OHM 0.1% 1/16W 0402" RESC1005X40N 18.059,20.328 r180 bottom
R103 "RES SMD 499 OHM 0.1% 1/16W 0402" RESC1005X40N 18.152,29.446 r180 bottom
R104 "RES 22 OHM 1% 1/16W 0402" RESC1005X40N 25.679,24.146 r90 bottom
R105 "RES 22 OHM 1% 1/16W 0402" RESC1005X40N 24.765,24.146 r270 bottom
R106 "RES SMD 10K OHM 1% 1/16W 0402" RESC1005X40N 28.727,20.759 r90 bottom
R107 "RES SMD 10K OHM 1% 1/16W 0402" RESC1005X40N 21.971,18.854 r90 bottom
R109 "RES SMD 10K OHM 1% 1/16W 0402" RESC1005X40N 33.833,25.603 r270 bottom
R110 "RES SMD 10K OHM 1% 1/16W 0402" RESC1005X40N 35.738,28.999 r90 bottom
R111 "RES SMD 10K OHM 1% 1/16W 0402" RESC1005X40N 33.807,28.27 r180 bottom
R112 "RES SMD 10K OHM 1% 1/16W 0402" RESC1005X40N 31.496,31.572 r270 bottom
R113 "RES SMD 10K OHM 1% 1/16W 0402" RESC1005X40N 30.455,31.623 r270 bottom
R114 "RES SMD 220 OHM 0.1% 1/16W 0402" RESC1005X40N 13.919,26.67 r90 bottom
R115 "RES SMD 220 OHM 0.1% 1/16W 0402" RESC1005X40N 11.633,32.69 r0 bottom
R116 "RES SMD 499 OHM 0.1% 1/16W 0402" RESC1005X40N 12.471,33.833 r180 bottom
R117 "RES SMD 499 OHM 0.1% 1/16W 0402" RESC1005X40N 6.466,15.78 r270 bottom
R118 "RES SMD 100K OHM 0.1% 1/16W 0402" RESC1005X40N 25.883,5.392 r0 bottom
R119 "RES SMD 10K OHM 1% 1/16W 0402" RESC1005X40N 18.87,13.854 r180 top
R120 "RES SMD 681 OHM 0.1% 1/16W 0402" RESC1005X40N 10.211,32.215 r270 bottom
R121 "RES SMD 499 OHM 0.1% 1/16W 0402" RESC1005X40N 15.367,26.162 r180 bottom
R122 "RES SMD 681 OHM 0.1% 1/16W 0402" RESC1005X40N 12.471,26.187 r180 bottom
R123 "RES SMD 499 OHM 0.1% 1/16W 0402" RESC1005X40N 8.755,32.613 r180 bottom
R124 "RES SMD 681 OHM 0.1% 1/16W 0402" RESC1005X40N 8.001,31.665 r0 bottom
R125 "RES SMD 4.7 OHM 0.1% 1/16W 0402" RESC1005X40N 8.396,15.788 r270 bottom
R126 "RES SMD 220 OHM 0.1% 1/16W 0402" RESC1005X40N 6.79,32.613 r0 bottom
R127 "RES SMD 4.7 OHM 0.1% 1/16W 0402" RESC1005X40N 9.997,15.763 r270 bottom
R128 "RES SMD 54.9KOHM 0.1% 1/16W 0402" RESC1005X40N 6.695,20.309 r270 bottom
R129 "RES SMD 10K OHM 1% 1/16W 0402" RESC1005X40N 12.421,3.861 r0 top
R130 "RES 50K OHM 0.1% 1/10W 0603" RESC1608X55N 5.628,18.709 r0 bottom
R131 "RES SMD 499 OHM 0.1% 1/16W 0402" RESC1005X40N 11.447,25.247 r180 bottom
R132 "RES SMD 681 OHM 0.1% 1/16W 0402" RESC1005X40N 10.549,26.204 r0 bottom
R133 "RES SMD 220 OHM 0.1% 1/16W 0402" RESC1005X40N 9.474,25.197 r0 bottom
R134 "RES SMD 499 OHM 0.1% 1/16W 0402" RESC1005X40N 11.673,15.763 r270 bottom
R135 "RES SMD 10K OHM 1% 1/16W 0402" RESC1005X40N 32.868,25.603 r270 bottom
R200 "RES 220K OHM 0.1% 1/16W 0402" RESC1005X40N 18.055,44.813 r270 top
R201 "RES SMD 309K OHM 0.1% 1/16W 0402" RESC1005X40N 3.789,33.925 r270 top
R202 "RES SMD 274K OHM 0.5% 1/10W 0603" 0603_Yageo_Res 37.795,39.29 r270 top
R203 "RES SMD 54.9KOHM 0.1% 1/16W 0402" RESC1005X40N 24.684,41.181 r90 top
R204 "RES SMD 100K OHM 0.1% 1/16W 0402" RESC1005X40N 6.583,34.425 r180 top
R205 "RES SMD 100K OHM 0.1% 1/16W 0402" RESC1005X40N 39.37,38.285 r180 top
R206 "RES SMD 1K OHM 0.1% 1/16W 0402" RESC1005X40N 19.555,39.098 r0 top
R207 "RES 50K OHM 0.1% 1/10W 0603" RESC1608X55N 25.7,46.757 r90 top
R208 "RES SMD 10K OHM 1% 1/16W 0402" RESC1005X40N 31.75,47.752 r90 top
R209 "RES SMD 10K OHM 1% 1/16W 0402" RESC1005X40N 34.646,47.76 r90 top
R210 "RES SMD 10K OHM 1% 1/16W 0402" RESC1005X40N 30.472,43.899 r180 top
R211 "RES SMD 10K OHM 1% 1/16W 0402" RESC1005X40N 32.715,47.76 r90 top
R212 "RES SMD 100K OHM 0.1% 1/16W 0402" RESC1005X40N 26.01,44.534 r180 top
R213 "RES SMD 15K OHM 0.1% 1/16W 0402" RESC1005X40N 25.683,42.603 r180 top
R214 "RES 5K OHM 1% 1/16W 0402" RESC1005X40N 36.906,46.558 r270 top
R215 "RES SMD 9.88KOHM 0.5% 1/16W 0402" RESC1005X40N 28.651,42.959 r0 top
R216 "RES SMD 10K OHM 1% 1/16W 0402" RESC1005X40N 33.68,47.76 r270 top
R217 "RES 270 OHM 1% 1/10W 0603" 0603_Yageo_Res 37.059,47.429 r90 bottom
R218 "RES 500 OHM 0.1% 1/10W 0603" 0603_Yageo_Res 29.933,41.914 r180 top
R219 "RES 88.7K OHM 1% 1/16W 0402" RESC1005X40N 8.72,29.591 r0 top
R220 "RES SMD 135K OHM 0.1% 1/10W 0603" RESC1608X55N 6.008,29.896 r180 top
R221 "RES SMD 10K OHM 1% 1/16W 0402" RESC1005X40N 35.611,47.76 r270 top
R222 "RES 909K OHM 1% 1/16W 0402" RESC1005X40N 18.671,17.441 r90 top
R223 "RES SMD 10K OHM 1% 1/16W 0402" RESC1005X40N 33.807,17.924 r270 top
R224 "RES SMD 15K OHM 0.1% 1/16W 0402" RESC1005X40N 6.553,28.753 r0 top
R225 "RES SMD 90.9KOHM 0.1% 1/16W 0402" RESC1005X40N 18.214,23.351 r0 top
R226 "RES 50K OHM 0.1% 1/10W 0603" RESC1608X55N 7.327,31.217 r0 top
R227 "RES 0.5 OHM 1% 1/4W 0805" RES-PYU-PE 42.723,42.781 r270 top
R228 "RES SMD 100K OHM 0.1% 1/16W 0402" RESC1005X40N 15.09,19.338 r270 top
R229 "RES SMD 1K OHM 0.1% 1/16W 0402" RESC1005X40N 15.09,21.573 r90 top
R230 "RES SMD 15.4KOHM 0.1% 1/16W 0402" RESC1005X40N 5.994,27.178 r90 top
R231 "RES 50K OHM 0.1% 1/10W 0603" RESC1608X55N 15.688,23.529 r0 top
R232 "RES SMD 33.2KOHM 0.1% 1/16W 0402" RESC1005X40N 7.163,22.758 r0 top
R233 "RES SMD 33.2KOHM 0.1% 1/16W 0402" RESC1005X40N 16.741,16.722 r180 top
R234 "RES SMD 5.1K OHM 0.1% 1/16W 0402" RESC1005X35N 42.778,44.632 r90 bottom
R235 "RES SMD 5.1K OHM 0.1% 1/16W 0402" RESC1005X35N 46.41,44.613 r90 bottom
R236 "RES 172K OHM 0.1% 1/10W 0603" RESC1608X55N 33.438,13.609 r0 top
R237 "RES SMD 54.9KOHM 0.1% 1/16W 0402" RESC1005X40N 30.455,12.344 r180 top
R238 "RES 50K OHM 0.1% 1/10W 0603" RESC1608X55N 27.115,11.14 r0 top
R239 "RES SMD 100K OHM 0.1% 1/16W 0402" RESC1005X40N 28.194,7.567 r270 top
R240 "RES SMD 100K OHM 0.1% 1/16W 0402" RESC1005X40N 27.711,9.032 r0 top
R241 "RES SMD 100K OHM 0.1% 1/16W 0402" RESC1005X40N 25.933,34.341 r0 top
R242 "RES SMD 10K OHM 1% 1/16W 0402" RESC1005X40N 21.082,38.616 r90 top
R243 "RES 909K OHM 1% 1/16W 0402" RESC1005X40N 22.86,26.594 r90 top
R244 "RES SMD 90.9KOHM 0.1% 1/16W 0402" RESC1005X40N 22.395,32.592 r0 top
R245 "RES SMD 100K OHM 0.1% 1/16W 0402" RESC1005X40N 19.304,28.324 r270 top
R246 "RES SMD 1K OHM 0.1% 1/16W 0402" RESC1005X40N 19.279,30.864 r90 top
R247 "RES 50K OHM 0.1% 1/10W 0603" RESC1608X55N 19.851,32.769 r0 top
R248 "RES SMD 33.2KOHM 0.1% 1/16W 0402" RESC1005X40N 20.955,25.988 r180 top
R300 "RES SMD 10K OHM 1% 1/16W 0402" RESC1005X40N 32.857,23.431 r90 top
R301 "RES SMD 10K OHM 1% 1/16W 0402" RESC1005X40N 32.882,25.361 r270 top
R302 "RES SMD 1K OHM 0.1% 1/16W 0402" RESC1005X40N 33.822,25.361 r270 top
R303 "RES 22 OHM 1% 1/16W 0402" RESC1005X40N 44.171,33.96 r180 top
R304 "RES 22 OHM 1% 1/16W 0402" RESC1005X40N 40.919,21.515 r270 top
R305 "RES 22 OHM 1% 1/16W 0402" RESC1005X40N 44.643,28.874 r270 top
R306 "RES 22 OHM 1% 1/16W 0402" RESC1005X40N 41.885,21.514 r270 top
R307 "RES 22 OHM 1% 1/16W 0402" RESC1005X40N 44.704,26.772 r180 top
R308 "RES SMD 1M OHM 0.1% 1/16W 0402" RESC1005X40N 44.643,30.941 r270 top
R400 "RES SMD 10K OHM 1% 1/16W 0402" RESC1005X40N 13.284,51.925 r0 bottom
R401 "RES SMD 10K OHM 1% 1/16W 0402" RESC1005X40N 58.336,39.53 r270 bottom
R402 "RES SMD 10K OHM 1% 1/16W 0402" RESC1005X40N 55.931,12.725 r0 top
R403 "RES SMD 10K OHM 1% 1/16W 0402" RESC1005X40N 55.956,14.097 r0 top
R404 "RES SMD 10K OHM 1% 1/16W 0402" RESC1005X40N 58.336,27.965 r270 bottom
R405 "RES SMD 10K OHM 1% 1/16W 0402" RESC1005X40N 9.652,49.309 r270 bottom
R406 "RES SMD 10K OHM 1% 1/16W 0402" RESC1005X40N 58.412,25.095 r90 bottom
R407 "RES SMD 10K OHM 1% 1/16W 0402" RESC1005X40N 8.636,49.301 r270 bottom
R408 "RES SMD 10K OHM 1% 1/16W 0402" RESC1005X40N 4.115,51.849 r0 bottom
R412 "RES SMD 10K OHM 1% 1/16W 0402" RESC1005X40N 1.575,51.12 r270 top
R413 "RES SMD 10K OHM 1% 1/16W 0402" RESC1005X40N 55.872,28.727 r0 top
R414 "RES SMD 10K OHM 1% 1/16W 0402" RESC1005X40N 41.648,18.473 r180 bottom
R415 "RES SMD 10K OHM 1% 1/16W 0402" RESC1005X40N 52.222,18.669 r0 bottom
R416 "RES SMD 10K OHM 1% 1/16W 0402" RESC1005X40N 41.664,17.508 r180 bottom
R417 "RES SMD 10K OHM 1% 1/16W 0402" RESC1005X40N 41.664,16.543 r180 bottom
R418 "RES SMD 10K OHM 1% 1/16W 0402" RESC1005X40N 52.265,17.686 r0 bottom
R419 "RES SMD 10K OHM 1% 1/16W 0402" RESC1005X40N 52.265,16.67 r180 bottom
R420 "RES SMD 100K OHM 0.1% 1/16W 0402" RESC1005X40N 54.026,15.062 r180 top
R421 "RES SMD 100K OHM 0.1% 1/16W 0402" RESC1005X40N 54.026,16.027 r180 top
R422 "RES SMD 10K OHM 1% 1/16W 0402" RESC1005X40N 54.026,14.097 r180 top
R423 "RES 32.4K OHM 1% 1/16W 0402" RESC1005X40N 50.394,14.14 r270 top
R424 "RES SMD 100K OHM 0.1% 1/16W 0402" RESC1005X40N 48.954,13.665 r0 top
R425 "RES SMD 100K OHM 0.1% 1/16W 0402" RESC1005X40N 52.68,17.78 r90 top
SW300 "SWITCH TACTILE SPST-NO 0.05A 16V" SW_PTS810_SJM_250_SMTR_LFS 22.464,2.249 r180 top
SW301 "SWITCH TACTILE SPST-NO 0.05A 16V" SW_PTS810_SJM_250_SMTR_LFS 22.494,5.829 r0 top
SW400 "SWITCH TACTILE SPST-NO 0.05A 12V" SW_TL1014BF220QG 60.775,30.302 r270 bottom
SW401 "SWITCH TACTILE SPST-NO 0.05A 12V" SW_TL1014BF220QG 60.775,41.98 r270 bottom
SW402 "SWITCH TACTILE SPST-NO 0.05A 12V" SW_TL1014BF220QG 60.775,22.758 r270 bottom
U100 "IC OP AMP 2CH 8-SON" SON50P300X300X80-9N200X120 18.212,23.833 r270 bottom
U101 "IC OP AMP 2CH 8-SON" SON50P300X300X80-9N200X120 18.186,33.078 r270 bottom
U102 "IC OP AMP 2CH 8-SON" SON50P300X300X80-9N200X120 11.557,29.436 r90 bottom
U103 "IC OP AMP 2CH 10-VSON" IC_OPA1622IDRCR 9.454,19.875 r270 bottom
U200 "IC REG BUCK BST ADJ 600MA 10MSOP" SOP50P490X110-10N 23.398,45.599 r270 top
U201 "IC REG CUK ADJ 250MA TSOT23-6" TSOT-23_S6 5.48,36.568 r0 top
U202 "IC BATT CHG LI-ION 1CELL 24VQFN" QFN50P400X400X100-25N 34.003,42.375 r270 top locked
U203 "IC REG LIN NEG ADJ 200MA 12-DFN" 05-08-1725_ADI 8.422,26.396 r270 top
U204 "IC REG LIN POS ADJ 200MA 10DFN" VREG_LT3042EDD#PBF 17.351,20.455 r270 top
U205 "IC REG BUCK BST ADJ 600MA 10MSOP" SOP50P490X110-10N 30.277,9.21 r90 top
U206 "IC REG LIN POS ADJ 200MA 10DFN" VREG_LT3042EDD#PBF 21.565,29.747 r270 top
U300 "IC FLASH 64MBIT SPI/QUAD 8WSON" SON127P600X500X80-9N 49.395,27.901 r0 top
U301 "ESP32-S3" IC_ESP32-S3 39.764,27.659 r0 top locked
U400 "IC LED DRIVER RGLTR 30MA 16VQFN" VQFN016V3030_ROM 51.994,11.405 r270 top
Y100 "XTAL OSC XO 22.5792MHZ CMOS SMD" OSC_ECS-2520MVLC-225.792-CN-TR 27.635,22.944 r180 bottom
Y101 "XTAL OSC TCXO 24.5760MHZ HCMOS" XTAL_ASTX-H11-24.576MHZ-T 24.043,21.243 r90 bottom

## Footprints (in the part's own frame and the unit in brackets; to place one, negate y for a bottom-side part, rotate by r counter-clockwise, add the part's x,y. Pads: shape width x height; smd on the part's side, far side on the other; paste and mask are expansions set on the pad)
05-08-1725_ADI [mm]
  rrect12% 0.7x0.25 smd paste+0 mask+0.05: 1(-1.445,1.125) 2(-1.445,0.675) 3(-1.445,0.225) 4(-1.445,-0.225) 5(-1.445,-0.675) 6(-1.445,-1.125) 7(1.445,-1.125) 8(1.445,-0.675) 9(1.445,-0.225) 10(1.445,0.225) 11(1.445,0.675) 12(1.445,1.125)
  rrect12% 1.65x2.38 smd paste+0 mask+0.05: 13(0,0)
  silkscreen extent -1.68,-1.68 1.68,1.68, body extent -1.55,-1.55 1.55,1.55, height 0.81
0603_Yageo_Res [mm]
  rrect12% 0.9x0.8 smd mask+0.05: 1(0.85,0) 2(-0.85,0)
  silkscreen extent -1.43,-0.5 1.43,0.5, body extent -0.8,-0.4 0.8,0.4, height 0.55
AMPHENOL_F32D-1A7Y1-21050 [mm]
  rect 0.25x1.3 smd paste+0 mask+0.05: 1(-12.25,3.08) 2(-11.75,3.08) 3(-11.25,3.08) 4(-10.75,3.08) 5(-10.25,3.08) 6(-9.75,3.08) 7(-9.25,3.08) 8(-8.75,3.08) 9(-8.25,3.08) 10(-7.75,3.08) 11(-7.25,3.08) 12(-6.75,3.08) 13(-6.25,3.08) 14(-5.75,3.08) 15(-5.25,3.08) 16(-4.75,3.08) 17(-4.25,3.08) 18(-3.75,3.08) 19(-3.25,3.08) 20(-2.75,3.08) 21(-2.25,3.08) 22(-1.75,3.08) 23(-1.25,3.08) 24(-0.75,3.08) 25(-0.25,3.08) 26(0.25,3.08) 27(0.75,3.08) 28(1.25,3.08) 29(1.75,3.08) 30(2.25,3.08) 31(2.75,3.08) 32(3.25,3.08) 33(3.75,3.08) 34(4.25,3.08) 35(4.75,3.08) 36(5.25,3.08) 37(5.75,3.08) 38(6.25,3.08) 39(6.75,3.08) 40(7.25,3.08) 41(7.75,3.08) 42(8.25,3.08) 43(8.75,3.08) 44(9.25,3.08) 45(9.75,3.08) 46(10.25,3.08) 47(10.75,3.08) 48(11.25,3.08) 49(11.75,3.08) 50(12.25,3.08)
  rect 1.73x2.8 smd paste+0 mask+0.05: S1(-14.19,0) S2(14.19,0)
  silkscreen extent -14.25,-2.05 14.25,4.75, body extent -14.55,-1.64 14.55,3.68, height 3.15
CAP_298D225X0016M2T [mm]
  rrect12% 0.7x0.61 smd mask+0.05: 1(-0.67,0) 2(0.67,0)
  silkscreen extent -1.15,-0.55 1.15,0.55, body extent -0.8,-0.43 0.8,0.43, height 0.9
CAP_MUR_0805 [mm]
  rect 0.7x1.3 smd mask+0.05: 1(0.95,0) 2(-0.95,0)
  silkscreen extent -1.5,-0.85 1.5,0.85, body extent -1,-0.63 1,0.63, height 0.95
CAPC1005X55N [mm]
  rrect12% 0.54x0.6 smd paste+0 mask+0.102: 1(-0.43,0) 2(0.43,0)
  silkscreen extent -0.85,-0.54 0.85,0.54, body extent -0.5,-0.25 0.5,0.25, height 0.55
CAPC1005X60N [mm]
  rrect12% 0.425x0.6 smd mask+0.05: 1(-0.425,0) 2(0.425,0)
  silkscreen extent -0.78,-0.43 0.78,0.43, body extent -0.5,-0.25 0.5,0.25, height 0.6
CAPC1608X100N [mm]
  rrect12% 0.9x0.8 smd mask+0.05: 1(0.8,0) 2(-0.8,0)
  silkscreen extent -1.4,-0.55 1.4,0.55, body extent -0.8,-0.4 0.8,0.4, height 1
CAPC2012X140N [mm]
  rrect12% 1x1.1 smd mask+0.05: 1(-1.1,0) 2(1.1,0)
  silkscreen extent -1.75,-0.75 1.75,0.75, body extent -1,-0.63 1,0.63, height 1.4
CAPC3225X270N [mm]
  rrect12% 1.53x2.72 smd mask+0.05: 1(-1.341,0) 2(1.341,0)
  silkscreen extent -2.25,-1.5 2.25,1.5, body extent -1.6,-1.25 1.6,1.25, height 2.7
CONN_505567_03_MOL [mil]
  rect 33x51 smd paste+0 mask+4.02: 1(49.21,-69.07) 2(0,-69.07) 3(-49.21,-69.07)
  rect 55x89 smd paste+0 mask+4.02: 4(-124.02,21.28) 5(124.02,21.28)
  silkscreen extent -143,-87 143,88, body extent -138,-83 138,82, height 153
CRYST_ECS-400 [mm]
  rrect12% 0.85x0.75 smd mask+0.05: 1(-0.675,0.525) 2(0.675,0.525) 3(0.675,-0.525) 4(-0.675,-0.525)
  silkscreen extent -1.25,-1.1 1.25,1.1, body extent -1,-0.8 1,0.8, height 0.5
CUI_MSD-1-A [mm]
  rect 0.7x1.6 smd mask+0.102: 1(2.25,7.75) 2(1.15,7.75) 3(0.05,7.75) 4(-1.05,7.75) 5(-2.15,7.75) 6(-3.25,7.75) 7(-4.35,7.75) 8(-5.45,7.75) CD(-6.55,7.75)
  rect 1.2x1.8 smd mask+0.102: G1(-7.75,6.45)
  rect 1.6x1.5 smd mask+0.102: G2(6.85,6.7)
  rect 1.2x2.2 smd mask+0.102: G3(-7.75,-2.85) G4(7.75,-2.85)
  round 1 hole 1 unplated: ""(-4.95,-3.25) ""(3.05,-3.25)
  silkscreen extent -7.42,-7.25 7.42,9.2, body extent -8.12,-7.32 8.03,7.73, height 1.85
CUI_SJ1-3535NS [mm]
  oval 1.4x2.8 hole 1 slot 2 at 90 deg: 1(-9.144,4.064) 2(-6.744,6.064) 3(-1.244,6.064) 4(2.456,4.064) 5(-3.044,4.064)
  oval 2.8x1.4 hole 1 slot 2 at 0 deg: SH1(-8.144,-0.236) SH2(0.756,-0.236) SH3(0.756,8.464)
  silkscreen extent -10.64,-0.74 4.06,9.91, body extent -14.26,-0.68 4.1,9.02, height 12.65
DIOM5226X230N [mm]
  rrect25% 2.33x1.55 smd: A(-2.135,0) C(2.135,0)
  silkscreen extent -4.4,-1.3 2.15,1.3, body extent -2.6,-1.3 2.6,1.3, height 2.4
EN12-VS_TTE [mil]
  round 59 hole 39 paste-99999 mask+0: 1(-196.85,-344) 2(-98.43,-344) 3(0,-344) 4(-196.85,-245.57) 5(0,-245.57)
  rrect50% 157.48x157.48 hole 118.11 paste-99999 mask-39.5: 6(153.57,-206.25) 7(-350.43,-206.25)
  silkscreen extent -347,-413 151,-114, body extent -345,-902 150,-114, height 771
GCT_USB4085-GF-A_REVA4 [mm]
  round 0.65 hole 0.4: A1(-2.975,4.36) A4(-2.125,4.36) A5(-1.275,4.36) A6(-0.425,4.36) A7(0.425,4.36) A8(1.275,4.36) A9(2.125,4.36) A12(2.975,4.36) B1(2.975,3.01) B4(2.125,3.01) B5(1.275,3.01) B6(0.425,3.01) B7(-0.425,3.01) B8(-1.275,3.01) B9(-2.125,3.01) B12(-2.975,3.01)
  oval 0.9x1.7 hole 0.6 slot 1.4 at 90 deg: S1(-4.325,0) S2(4.325,0)
  oval 0.9x2.4 hole 0.6 slot 2.1 at 90 deg: S3(-4.325,3.38) S4(4.325,3.38)
  silkscreen extent -4.47,-1.74 4.47,5.8, body extent -4.47,-4.25 4.47,4.92, height 3.46
IC_ESD122DMXR [mm]
  rrect50% 0.2x0.2 smd paste+0 mask+0.05: 1(-0.15,0) 2(0.15,-0.34) 3(0.15,0.34)
  silkscreen extent -0.75,-0.55 0.35,0.55, body extent -0.3,-0.5 0.3,0.5, height 0.4
IC_ESP32-S3 [mm]
  rect 0.65x0.22 smd mask+0.05: 1(-3.425,2.6) 2(-3.425,2.2) 3(-3.425,1.8) 4(-3.425,1.4) 5(-3.425,1) 6(-3.425,0.6) 7(-3.425,0.2) 8(-3.425,-0.2) 9(-3.425,-0.6) 10(-3.425,-1) 11(-3.425,-1.4) 12(-3.425,-1.8) 13(-3.425,-2.2) 14(-3.425,-2.6) 29(3.425,-2.6) 30(3.425,-2.2) 31(3.425,-1.8) 32(3.425,-1.4) 33(3.425,-1) 34(3.425,-0.6) 35(3.425,-0.2) 36(3.425,0.2) 37(3.425,0.6) 38(3.425,1) 39(3.425,1.4) 40(3.425,1.8) 41(3.425,2.2) 42(3.425,2.6)
  rect 0.22x0.65 smd mask+0.05: 15(-2.6,-3.425) 16(-2.2,-3.425) 17(-1.8,-3.425) 18(-1.4,-3.425) 19(-1,-3.425) 20(-0.6,-3.425) 21(-0.2,-3.425) 22(0.2,-3.425) 23(0.6,-3.425) 24(1,-3.425) 25(1.4,-3.425) 26(1.8,-3.425) 27(2.2,-3.425) 28(2.6,-3.425) 43(2.6,3.425) 44(2.2,3.425) 45(1.8,3.425) 46(1.4,3.425) 47(1,3.425) 48(0.6,3.425) 49(0.2,3.425) 50(-0.2,3.425) 51(-0.6,3.425) 52(-1,3.425) 53(-1.4,3.425) 54(-1.8,3.425) 55(-2.2,3.425) 56(-2.6,3.425)
  round 0.5 hole 0.4 mask+0: 57(-1.5,-0.75) 57(-1.5,0.75) 57(-0.75,-1.5) 57(-0.75,0) 57(-0.75,1.5) 57(0,-0.75) 57(0,0.75) 57(0.75,-1.5) 57(0.75,0) 57(0.75,1.5) 57(1.5,-0.75) 57(1.5,0.75)
  rect 4.1x4.1 smd paste-1.55: 57(0,0)
  silkscreen extent -4.55,-3.5 3.5,3.5, body extent -3.5,-3.5 3.5,3.5, height 0.9
IC_OPA1622IDRCR [mm]
  rrect25% 0.6x0.24 smd mask+0.07: 1(-1.4,1) 2(-1.4,0.5) 3(-1.4,0) 4(-1.4,-0.5) 5(-1.4,-1) 6(1.4,-1) 7(1.4,-0.5) 8(1.4,0) 9(1.4,0.5) 10(1.4,1)
  round 0.3 hole 0.2 mask+0: 11(-0.575,0) 11(0,-0.95) 11(0,0.95) 11(0.575,0)
  round 0.025 smd paste+0 mask+0.07: 11(0,0)
  Top Layer (Sig) region: 0.375,1.2 0.825,1.2 0.825,-1.2 0.375,-1.2 0.375,-1.7 0.125,-1.7 0.125,-1.2 -0.125,-1.2 -0.125,-1.7 -0.375,-1.7 -0.375,-1.2 -0.825,-1.2 -0.825,1.2 -0.375,1.2 -0.375,1.7 -0.125,1.7 -0.125,1.2 0.125,1.2 0.125,1.7 0.375,1.7
  silkscreen extent -1.5,-1.5 1.5,1.5, body extent -1.5,-1.5 1.5,1.5, height 1
IND_LQW32FT220M2HL [mm]
  rrect12% 0.9x2.5 smd mask+0.05: 1(-1.55,0) 2(1.55,0)
  silkscreen extent -2.28,-1.48 2.28,1.48
IND_MHQ100507 [mm]
  rrect12% 0.5x0.5 smd paste+0 mask+0.05: 1(-0.45,0) 2(0.45,0)
  silkscreen extent -0.85,-0.4 0.85,0.4
IND_SRP4030FA [mm]
  rect 3.8x1.1 smd paste+0 mask+0.1: 1(0,-1.25) 2(0,1.25)
  silkscreen extent -2.25,-2.25 2.25,2.25, body extent -2.05,-2.05 2.05,2.05, height 2.86
IND_TFM141206BLE [mm]
  rrect12% 0.625x1.3 smd mask+0.05: 1(-0.7,0) 2(0.7,0)
  silkscreen extent -1.18,-0.8 1.18,0.8
IND_XGL5050 [mm]
  rrect12% 1.18x4.7 smd mask+0.05: 1(-1.655,0) 2(1.655,0)
  silkscreen extent -2.75,-2.88 2.75,2.88, body extent -2.74,-2.84 2.74,2.84, height 5.15
LEDM1608X80 [mm]
  rect 0.8x0.8 smd: A(0.75,0) C(-0.75,0)
  silkscreen extent -1.78,0.41 -1.52,0.66, body extent -0.8,-0.4 0.8,0.4, height 0.8
OSC_ECS-2520MVLC-225.792-CN-TR [mm]
  rect 0.9x0.8 smd mask+0.05: 1(-0.925,-0.725) 2(0.925,-0.725) 3(0.925,0.725) 4(-0.925,0.725)
  silkscreen extent -2,-1 0.22,1, body extent -1.25,-1 1.25,1, height 0.9
QFN40P300X500X80-31N-D [mm]
  rrect12% 0.75x0.2 smd mask+0.05: 1(-1.5,1.8) 2(-1.5,1.4) 3(-1.5,1) 4(-1.5,0.6) 5(-1.5,0.2) 6(-1.5,-0.2) 7(-1.5,-0.6) 8(-1.5,-1) 9(-1.5,-1.4) 10(-1.5,-1.8) 16(1.5,-1.8) 17(1.5,-1.4) 18(1.5,-1) 19(1.5,-0.6) 20(1.5,-0.2) 21(1.5,0.2) 22(1.5,0.6) 23(1.5,1) 24(1.5,1.4) 25(1.5,1.8)
  rrect12% 0.2x0.75 smd mask+0.05: 11(-0.8,-2.5) 12(-0.4,-2.5) 13(0,-2.5) 14(0.4,-2.5) 15(0.8,-2.5) 26(0.8,2.5) 27(0.4,2.5) 28(0,2.5) 29(-0.4,2.5) 30(-0.8,2.5)
  rrect12% 1.8x3.8 smd mask+0.05: 31(0,0)
  silkscreen extent -1.97,2.3 -1.78,2.5, body extent -1.55,-2.55 1.55,2.55, height 0.8
QFN50P400X400X100-25N [mm]
  rrect40% 0.58x0.24 smd mask+0.07: 1(-1.935,1.25) 2(-1.935,0.75) 3(-1.935,0.25) 4(-1.935,-0.25) 5(-1.935,-0.75) 6(-1.935,-1.25) 13(1.935,-1.25) 14(1.935,-0.75) 15(1.935,-0.25) 16(1.935,0.25) 17(1.935,0.75) 18(1.935,1.25)
  rrect40% 0.24x0.58 smd mask+0.07: 7(-1.25,-1.935) 8(-0.75,-1.935) 9(-0.25,-1.935) 10(0.25,-1.935) 11(0.75,-1.935) 12(1.25,-1.935) 19(1.25,1.935) 20(0.75,1.935) 21(0.25,1.935) 22(-0.25,1.935) 23(-0.75,1.935) 24(-1.25,1.935)
  rrect3% 2.7x2.7 smd paste-0.45 mask+0.07: 25(0,0)
  silkscreen extent -3.07,-2 2,2, body extent -2,-2 2,2, height 1
RES-PYU-PE [mm]
  rrect12% 1.02x1.27 smd paste+0 mask+0.05: 1(-1.01,0) 2(1.01,0)
  silkscreen extent -1.63,-0.76 1.63,0.76
RESC1005X35N [mm]
  rrect12% 0.56x0.6 smd paste+0 mask+0.05: 1(-0.435,0) 2(0.435,0)
  silkscreen extent -0.82,-0.4 0.83,0.4, body extent -0.5,-0.25 0.5,0.25, height 0.35
RESC1005X40N [mm]
  rrect12% 0.5x0.6 smd mask+0.05: 1(-0.5,0) 2(0.5,0)
  silkscreen extent -0.9,-0.43 0.9,0.43, body extent -0.5,-0.25 0.5,0.25, height 0.4
RESC1608X55N [mm]
  rrect12% 0.9x0.8 smd paste+0 mask+0.102: 1(-0.85,0) 2(0.85,0)
  silkscreen extent -1.5,-0.6 1.5,0.6, body extent -0.8,-0.4 0.8,0.4, height 0.55
SON50P300X300X80-9N200X120 [mm]
  rrect40% 0.7x0.25 smd mask+0.07: 1(-1.35,0.75) 2(-1.35,0.25) 3(-1.35,-0.25) 4(-1.35,-0.75) 5(1.35,-0.75) 6(1.35,-0.25) 7(1.35,0.25) 8(1.35,0.75)
  rrect8% 1.2x2 smd paste+0 mask+0.07: 9(0,0)
  silkscreen extent -1.55,-1.55 1.55,1.55, body extent -1.5,-1.5 1.5,1.5, height 0.8
SON127P600X500X80-9N [mm]
  rrect12% 1x0.4 smd mask+0.05: 1(-3,-1.905) 2(-3,-0.635) 3(-3,0.635) 4(-3,1.905) 5(3,1.905) 6(3,0.635) 7(3,-0.635) 8(3,-1.905)
  rrect12% 3.5x4 smd mask+0.05: 9(0,0)
SOP50P490X110-10N [mm]
  rect 0.889x0.305 smd paste+0 mask+0.05: 1(-2.107,1) 2(-2.107,0.5) 3(-2.107,0) 4(-2.107,-0.5) 5(-2.107,-1) 6(2.107,-1) 7(2.107,-0.5) 8(2.107,0) 9(2.107,0.5) 10(2.107,1)
  silkscreen extent -1.5,-1.5 1.5,1.5, body extent -2.45,-1.5 2.45,1.5, height 1.1
SOT65P210X110-3N [mm]
  rrect25% 1.19x0.4 smd paste+0 mask+0.102: 1(-0.96,0.65) 2(-0.96,-0.65) 3(0.96,0)
  silkscreen extent -1.81,-1.25 1.81,1.25, body extent -1.05,-1 1.05,1, height 1.1
SOT-23_MCC [mm]
  rrect12% 0.8x0.9 smd paste+0 mask+0.102: 1(-0.95,-1) 2(0.95,-1) 3(0,1)
  silkscreen extent -1.75,-1.75 1.75,1.75, body extent -1.46,-1.18 1.46,1.18, height 1.22
SW_PTS810_SJM_250_SMTR_LFS [mm]
  rect 1.05x0.65 smd mask+0.05: 1(-2.075,1.075) 2(2.075,1.075) 3(-2.075,-1.075) 4(2.075,-1.075)
  silkscreen extent -3.2,-1.62 2.1,1.62, body extent -2.3,-1.6 2.3,1.6, height 2.7
SW_TL1014BF220QG [mm]
  rect 1.2x1 smd mask+0.05: 1(2.8,0.85) 2(2.8,-0.85) 3(-2.8,0.85) 4(-2.8,-0.85)
  body extent -3.2,-2.75 3.2,1.75, height 1.65
TSOT-23_S6 [mm]
  rrect12% 1.22x0.62 smd paste+0 mask+0.05: 1(-1.31,0.95) 2(-1.31,0) 3(-1.31,-0.95) 4(1.31,-0.95) 5(1.31,0) 6(1.31,0.95)
  body extent -1.4,-1.45 1.4,1.45, height 1
TVS_ARR_4UNI_FP [mm]
  rect 1x0.7 smd mask+0.05: 1(-1.2,0.95) 2(-1.2,0) 3(-1.2,-0.95) 4(1.2,-0.95) 5(1.2,0) 6(1.2,0.95)
  silkscreen extent -2.28,-1.65 1.9,1.65
VQFN016V3030_ROM [mil]
  rect 28x9.84 smd paste+0 mask+1.97: 1(-57,30) 2(-57,10) 3(-57,-10) 4(-57,-30) 9(57,-30) 10(57,-10) 11(57,10) 12(57,30)
  rect 9.84x28 smd paste+0 mask+1.97: 5(-30,-57) 6(-10,-57) 7(10,-57) 8(30,-57) 13(30,57) 14(10,57) 15(-10,57) 16(-30,57)
  rect 55.12x55.12 smd paste+0 mask+1.97: 17(0,0)
  silkscreen extent -100,-64 64,64, body extent -59,-59 59,59, height 39
VREG_LT3042EDD#PBF [mm]
  rrect12% 0.7x0.25 smd mask+0.05: 1(-1.425,1) 2(-1.425,0.5) 3(-1.425,0) 4(-1.425,-0.5) 5(-1.425,-1) 6(1.425,-1) 7(1.425,-0.5) 8(1.425,0) 9(1.425,0.5) 10(1.425,1)
  rrect12% 1.65x2.38 smd paste-2 mask+0.05: 11(0,0)
  silkscreen extent -1.5,-1.5 1.5,1.5, body extent -1.5,-1.5 1.5,1.5, height 0.8
WE-CBF_0805_W4.0 [mm]
  rrect12% 0.9x1 smd paste+0 mask+0.05: 1(-1.05,0) 2(1.05,0)
  silkscreen extent -1.6,-0.65 1.6,0.65, body extent -1,-0.6 1,0.6, height 0.95
XTAL_ASTX-H11-24.576MHZ-T [mm]
  rect 1.3x1.1 smd mask+0.05: 1(-1.15,-0.95) 2(1.15,-0.95) 3(1.15,0.95) 4(-1.15,0.95)
  silkscreen extent -1.65,-2.3 1.65,1.3, body extent -1.6,-1.25 1.6,1.25, height 1.01

## Part data
B100: library part #1-053, Manufacturer 1="ESS Technology", Manufacturer Part Number 1=ES9038Q2M, Mouser Part Number=460-ES9038Q2M, <Termination>=SMD, AL-PN=#1-053, Creator Project=DAP, Geometry.Height=0.8mm, Lead Time="9 Weeks", Manufacturer_Name="ESS Technology", Manufacturer_Part_Number=ES9038Q2M, Mouser Price/Stock=https://www.mouser.co.uk/ProductDetail/ESS-Technology/ES9038Q2M?qs=sPbYRqrBIVmdeUedURuuOw%3D%3D, PartType=IC, Status=Verified, SubType=DAC, Supplier 1=Mouser, Supplier Label="Audio D/A Converter ICs Sabre 32 Reference Stereo low power audiophile DAC w/DOP", Supplier Part Number 1=460-ES9038Q2M, Type=Standard
C100 C101 C106 C107 C124 C138: library part #1-106, <Rating>=50V, <Tolerance>=0.01, <Value>=1.5nF, Manufacturer 1="Murata Electronics", Manufacturer Part Number 1=GCM1885C1H152FA16D, Supplier Part Number 1=490-18206-1-ND, <Footprint>=0603, <Spec>=C0G, <Termination>=SMD, AL-PN=#1-106, Creator Project=DAP, Lead Time="21 Weeks", PartType=Capacitor, Status=Verified, SubType=Ceramic, Supplier 1=Digikey, Supplier Label="1500 pF ±1% 50V Ceramic Capacitor C0G, NP0 0603 (1608 Metric)", Type=Standard
C102 C105 C113 C115 C120 C121 C129 C135 C139 C200 C215 C301 C305 C309 C312 C410 C411 C412 C413: library part #1-132, <Rating>=25V, <Tolerance>=0.1, <Value>=1uF, Manufacturer 1="Murata Electronics", Manufacturer Part Number 1=GCM188R71E105KA64D, Supplier Part Number 1=490-10673-1-ND, <Footprint>=0603, <Spec>=X7R, <Termination>=SMD, AL-PN=#1-132, Creator Project=DAP, Lead Time="21 Weeks", PartType=Capacitor, Status=Verified, SubType=Ceramic, Supplier 1=Digikey, Supplier Label="1 µF ±10% 25V Ceramic Capacitor X7R 0603 (1608 Metric)", Type=Standard
C103 C104 C108 C109 C110 C111 C112 C114 C116 C119 C122 C125 C126 C128 C133 C134 C213 C230 C302 C303 C306 C307 C311 C400 C401 C402 C403 C407 C408: library part #1-080, <Rating>=50V, <Tolerance>=0.1, <Value>=0.1uF, Manufacturer 1="Murata Electronics", Manufacturer Part Number 1=GCM155R71H104KE02D, Supplier Part Number 1=490-10672-1-ND, <Footprint>=0402, <Spec>=X7R, <Termination>=SMD, AL-PN=#1-080, Creator Project=DAP, Lead Time="21 Weeks", PartType=Capacitor, Status=Verified, SubType=Ceramic, Supplier 1=Digikey, Supplier Label="0.1 µF ±10% 50V Ceramic Capacitor X7R 0402 (1005 Metric)", Type=Standard
C117: library part #1-103, <Rating>=6.3V, <Tolerance>=0.2, <Value>=4.7uF, Manufacturer 1="Murata Electronics", Manufacturer Part Number 1=GRM155R60J475ME47D, Supplier Part Number 1=490-5915-1-ND, <Footprint>=0402, <Termination>=SMD, AL-PN=#1-103, Creator Project=DAP, Lead Time="17 Weeks", PartType=Capacitor, Status=Verified, SubType=Ceramic, Supplier 1=Digikey, Supplier Label="4.7 µF ±20% 6.3V Ceramic Capacitor X5R 0402 (1005 Metric)", Type=Standard
C118 C123 C132 C137: library part #1-107, <Rating>=50V, <Tolerance>=0.02, <Value>=2.7nF, Manufacturer 1="Murata Electronics", Manufacturer Part Number 1=GRM1555C1H272GE01D, Supplier Part Number 1=490-GRM1555C1H272GE01DCT-ND, <Footprint>=0402, <Spec>=C0G, <Termination>=SMD, AL-PN=#1-107, Creator Project=DAP, Lead Time="17 Weeks", PartType=Capacitor, Status=Verified, SubType=Ceramic, Supplier 1=Digikey, Supplier Label="2700 pF ±2% 50V Ceramic Capacitor C0G, NP0 0402 (1005 Metric)", Type=Standard
C127 C130 C131 C136: library part #1-108, <Rating>=50V, <Tolerance>=0.05, <Value>=13nF, Manufacturer 1="Murata Electronics", Manufacturer Part Number 1=GRM2195C1H133JA01D, Supplier Part Number 1=490-12752-1-ND, <Footprint>=0805, <Spec>=C0G, <Termination>=SMD, AL-PN=#1-108, Creator Project=DAP, Lead Time="17 Weeks", PartType=Capacitor, Status=Verified, SubType=Ceramic, Supplier 1=Digikey, Supplier Label="0.013 µF ±5% 50V Ceramic Capacitor C0G, NP0 0805 (2012 Metric)", Type=Standard
C201 C202: library part #1-070, <Rating>=25V, <Tolerance>=0.1, <Value>=2.2uF, Manufacturer 1="Murata Electronics", Manufacturer Part Number 1=GRM188Z71E225KE43D, Supplier Part Number 1=490-GRM188Z71E225KE43DCT-ND, <Footprint>=0603, <Spec>=X7R, <Termination>=SMD, AL-PN=#1-070, Creator Project=DAP, Lead Time="17 Weeks", PartType=Capacitor, Status=Verified, SubType=Ceramic, Supplier 1=Digikey, Supplier Label="2.2 µF ±10% 25V Ceramic Capacitor X7R 0603 (1608 Metric)", Type=Standard
C203 C206 C211 C216 C217 C218 C220 C224 C231 C232 C304 C409: library part #1-081, <Rating>=10V, <Tolerance>=0.1, <Value>=10uF, Manufacturer 1="Murata Electronics", Manufacturer Part Number 1=GCM21BR71A106KE22K, Supplier Part Number 1=490-14531-1-ND, <Footprint>=0805, <Spec>=X7R, <Termination>=SMD, AL-PN=#1-081, Creator Project=DAP, Lead Time="21 Weeks", PartType=Capacitor, Status=Verified, SubType=Ceramic, Supplier 1=Digikey, Supplier Label="10 µF ±10% 10V Ceramic Capacitor X7R 0805 (2012 Metric)", Type=Standard
C204 C208 C209 C227 C228 C229: library part #1-073, <Rating>=25V, <Tolerance>=0.1, <Value>=22uF, Manufacturer 1="Murata Electronics", Manufacturer Part Number 1=GCM32EC71E226KE36L, Supplier Part Number 1=490-GCM32EC71E226KE36LCT-ND, <Footprint>=1210, <Spec>=X7S, <Termination>=SMD, AL-PN=#1-073, Creator Project=DAP, Lead Time="21 Weeks", PartType=Capacitor, Status=Verified, SubType=Ceramic, Supplier 1=Digikey, Supplier Label="22 µF ±10% 25V Ceramic Capacitor X7S 1210 (3225 Metric)", Type=Standard
C205: library part #1-093, <Rating>=50V, <Tolerance>=0.05, <Value>=22pF, Manufacturer 1="Murata Electronics", Manufacturer Part Number 1=GRM1555C1H220JA01D, Supplier Part Number 1=490-5868-1-ND, <Footprint>=0402, <Spec>=C0G, <Termination>=SMD, AL-PN=#1-093, Creator Project=DAP, Lead Time="17 Weeks", PartType=Capacitor, Status=Verified, SubType=Ceramic, Supplier 1=Digikey, Supplier Label="22 pF ±5% 50V Ceramic Capacitor C0G, NP0 0402 (1005 Metric)", Type=Standard
C207: library part #1-059, <Rating>=16V, <Tolerance>=0.1, <Value>=33nF, Manufacturer 1="Murata Electronics", Manufacturer Part Number 1=GRM155R71C333KA01D, Supplier Part Number 1=490-3257-1-ND, <Footprint>=0402, <Spec>=X7R, <Termination>=SMD, AL-PN=#1-059, Creator Project=DAP, Lead Time="17 Weeks", PartType=Capacitor, Status=Verified, SubType=Ceramic, Supplier 1=Digikey, Supplier Label="0.033 µF ±10% 16V Ceramic Capacitor X7R 0402 (1005 Metric)", Type=Standard
C210: library part #1-048, <Rating>=50V, <Tolerance>=0.1, <Value>=0.1uF, Manufacturer 1="Murata Electronics", Manufacturer Part Number 1=GRM155R71H104KE14D, Supplier Part Number 1=490-10700-1-ND, <Footprint>=0402, <Spec>=X7R, <Termination>=SMD, AL-PN=#1-048, Creator Project=aRTy, Lead Time="17 Weeks", PartType=Capacitor, Status=Verified, SubType=Ceramic, Supplier 1=Digikey, Supplier Label="0.1 µF ±10% 50V Ceramic Capacitor X7R 0402 (1005 Metric)", Type=Standard
C212 C226: library part #1-077, <Rating>=50V, <Tolerance>=0.02, <Value>=1.5nF, Manufacturer 1="Murata Electronics", Manufacturer Part Number 1=GRM1555C1H152GA01D, Supplier Part Number 1=490-GRM1555C1H152GA01DCT-ND, <Footprint>=0402, <Spec>=C0G, <Termination>=SMD, AL-PN=#1-077, Creator Project=DAP, Lead Time="17 Weeks", PartType=Capacitor, Status=Verified, SubType=Ceramic, Supplier 1=Digikey, Supplier Label="1500 pF ±2% 50V Ceramic Capacitor C0G, NP0 0402 (1005 Metric)", Type=Standard
C214: library part #1-092, <Rating>=35V, <Tolerance>=0.1, <Value>=1uF, Manufacturer 1="Murata Electronics", Manufacturer Part Number 1=GRM155R6YA105KE11D, Supplier Part Number 1=490-10019-1-ND, <Footprint>=0402, <Spec>=X5R, <Termination>=SMD, AL-PN=#1-092, Creator Project=DAP, Lead Time="17 Weeks", PartType=Capacitor, Status=Verified, SubType=Ceramic, Supplier 1=Digikey, Supplier Label="1 µF ±10% 35V Ceramic Capacitor X5R 0402 (1005 Metric)", Type=Standard
C219 C221: library part #1-071, <Rating>=16V, <Tolerance>=0.1, <Value>=4.7uF, Manufacturer 1="Murata Electronics", Manufacturer Part Number 1=GRM21BR71C475KE51L, Supplier Part Number 1=490-14466-1-ND, <Footprint>=0805, <Spec>=X7R, <Termination>=SMD, AL-PN=#1-071, Creator Project=DAP, Lead Time="17 Weeks", PartType=Capacitor, Status=Verified, SubType=Ceramic, Supplier 1=Digikey, Supplier Label="4.7 µF ±10% 16V Ceramic Capacitor X7R 0805 (2012 Metric)", Type=Standard
C222 C223 C233: library part #1-098, <Rating>=16V, <Tolerance>=0.2, <Value>=2.2uF, Manufacturer 1="Vishay Sprague", Manufacturer Part Number 1=298D225X0016M2T, Supplier Part Number 1=718-1613-1-ND, <Footprint>=0603, <Termination>=SMD, AL-PN=#1-098, Creator Project=DAP, Lead Time="23 Weeks", PartType=Capacitor, Status=Verified, SubType=Tantalum, Supplier 1=Digikey, Supplier Label="2.2 µF Molded Tantalum Capacitors 16 V 0603 (1608 Metric) 12Ohm", Type=Standard
C225: library part #1-096, <Rating>=50V, <Tolerance>=0.05, <Value>=100pF, Manufacturer 1="Murata Electronics", Manufacturer Part Number 1=GRM1555C1H101JA01D, Supplier Part Number 1=490-5922-1-ND, <Footprint>=0402, <Spec>=C0G, <Termination>=SMD, AL-PN=#1-096, Creator Project=DAP, Lead Time="17 Weeks", PartType=Capacitor, Status=Verified, SubType=Ceramic, Supplier 1=Digikey, Supplier Label="100 pF ±5% 50V Ceramic Capacitor C0G, NP0 0402 (1005 Metric)", Type=Standard
C300 C404 C405: library part #1-040, <Rating>=16V, <Tolerance>=0.1, <Value>=10nF, Manufacturer 1=YAGEO, Manufacturer Part Number 1=CC0402KRX7R7BB103, Supplier Part Number 1=311-1042-2-ND, <Footprint>=0402, <Spec>=X7R, <Termination>=SMD, AL-PN=#1-040, Creator Project=aRTy, Lead Time="21 Weeks", PartType=Capacitor, Status=Verified, SubType=Ceramic, Supplier 1=Digikey, Supplier Label="10000 pF ±10% 16V Ceramic Capacitor X7R 0402 (1005 Metric)", Type=Standard
C308 C310: library part #1-122, <Rating>=50V, <Tolerance>=0.01, <Value>=12pF, Manufacturer 1="Murata Electronics", Manufacturer Part Number 1=GJM1555C1H120FB01D, Supplier Part Number 1=490-11190-1-ND, <Footprint>=0402, <Spec>=C0G, <Termination>=SMD, AL-PN=#1-122, Creator Project=DAP, Lead Time="17 Weeks", PartType=Capacitor, Status=Verified, SubType=Ceramic, Supplier 1=Digikey, Supplier Label="12 pF ±1% 50V Ceramic Capacitor C0G, NP0 0402 (1005 Metric)", Type=Standard
CR300: library part #1-118, <Rating>=10pF, <Value>="40 MHz", Manufacturer 1="ECS Inc.", Manufacturer Part Number 1=ECS-400-10-37B2-CKY-TR, Supplier Part Number 1=50-ECS-400-10-37B2-CKY-TRCT-ND, <Spec>=40Ohm, <Termination>=SMD, AL-PN=#1-118, Creator Project=DAP, Lead Time=N/A, PartType=Crystal, Status=Verified, Supplier 1=Digikey, Supplier Label="40 MHz ±10ppm Crystal 12pF 40 Ohms 4-SMD, No Lead", Type=Standard
D100: library part #1-112, <Rating>=0.2pF, <Value>=8.4V(Cl), Manufacturer 1="Texas Instruments", Manufacturer Part Number 1=ESD122DMXR, Supplier Part Number 1=296-48543-1-ND, <Termination>=SMD, AL-PN=#1-112, Creator Project=DAP, Lead Time="9 Weeks", PartType=Diode, Status=Verified, SubType=TVS, Supplier 1=Digikey, Supplier Label="8.4V (Typ) Clamp 2.5A (8/20µs) Ipp Tvs Diode Surface Mount 3-X2SON (1x0.6)", Type=Standard
D200 D204: library part #1-009, <Rating>=30mA, <Value>=2.1V, Manufacturer 1="Lite-On Inc", Manufacturer Part Number 1=LTST-C190GKT, Supplier Part Number 1=160-LTST-C190GKTTR-ND, <Spec>=GREEN, <Termination>=SMD, AL-PN=#1-009, Creator Project=Bootcamp, Lead Time="14 Weeks", PartType=Diode, Status=Verified, SubType=LED, Supplier 1=Digikey, Supplier Label="Green 569nm LED Indication - Discrete 2.1V 0603 (1608 Metric)", Type=Standard
D201: library part #1-049, <Rating>=7.78V(Bd), <Value>=12V(Cl), Manufacturer 1="Diodes Incorporated", Manufacturer Part Number 1=SMAJ7.0A-13-F, Supplier Part Number 1=SMAJ7.0A-FDICT-ND, <Spec>=7V(Rv), <Termination>=SMD, AL-PN=#1-049, Creator Project=aRTy, Lead Time="12 Weeks", PartType=Diode, Status=Verified, SubType=TVS, Supplier 1=Digikey, Supplier Label="12V Clamp 33.3A Ipp Tvs Diode Surface Mount SMA", Type=Standard
D202 D203: library part #1-099, <Rating>=1.5pF, <Value>=12.4V(Cl), Manufacturer 1="Texas Instruments", Manufacturer Part Number 1=TPD2E2U06QDCKRQ1, Supplier Part Number 1=296-44302-1-ND, <Spec>=20kV, <Termination>=SMD, AL-PN=#1-099, Creator Project=DAP, Lead Time="9 Weeks", PartType=Diode, Status=Verified, SubType=TVS, Supplier 1=Digikey, Supplier Label="12.4V (Typ) Clamp 5.5A (8/20µs) Ipp Tvs Diode Surface Mount SC-70-3", Type=Standard
D400 D401: library part #1-127, <Rating>=12A, <Value>=5V(RWM), Manufacturer 1="Good-Ark Semiconductor", Manufacturer Part Number 1=GSER5U007, Supplier Part Number 1=4786-GSER5U007CT-ND, <Termination>=SMD, AL-PN=#1-127, Creator Project=DAP, Lead Time="16 Weeks", PartType=Diode, Status=Verified, SubType=TVS, Supplier 1=Digikey, Supplier Label="25V Clamp 12A (8/20µs) Ipp Tvs Diode Surface Mount SOT-23-6L", Type=Standard